# Altium PCB OPAMP_DEV_SOT5_6-23.PcbDoc (part 1 of 2)
Units mm, origin at the board's own origin, x right, y up, seen from the top; angles counter-clockwise.
Board outline 91.45 x 80 mm, 4 copper layers (Top Layer, Layer 1, Layer 2, Bottom Layer), stack 1.586 mm thick; 58 components, 23 nets, 145 pads, 362 vias.
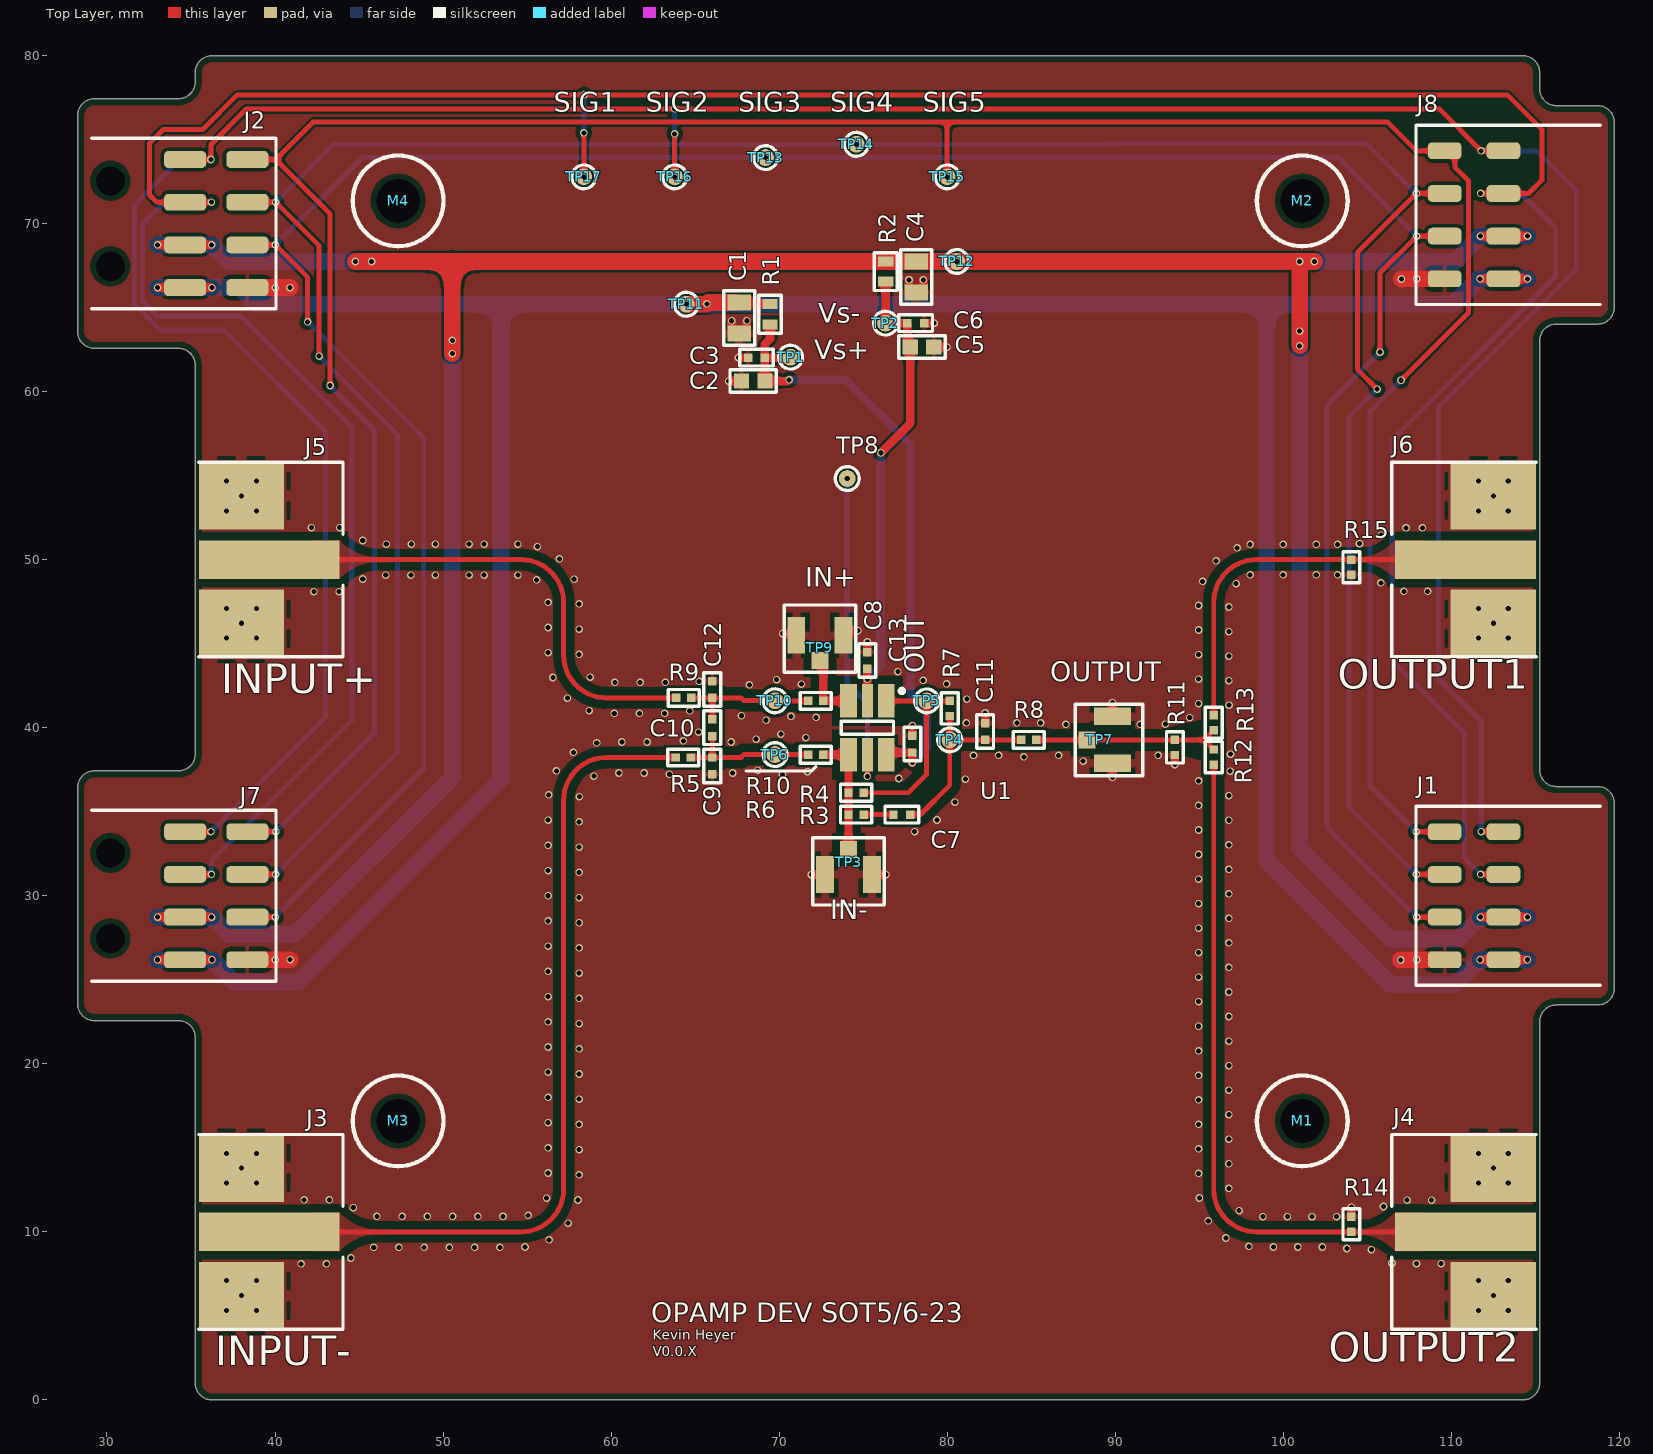
[diagram p0: Top Layer view]
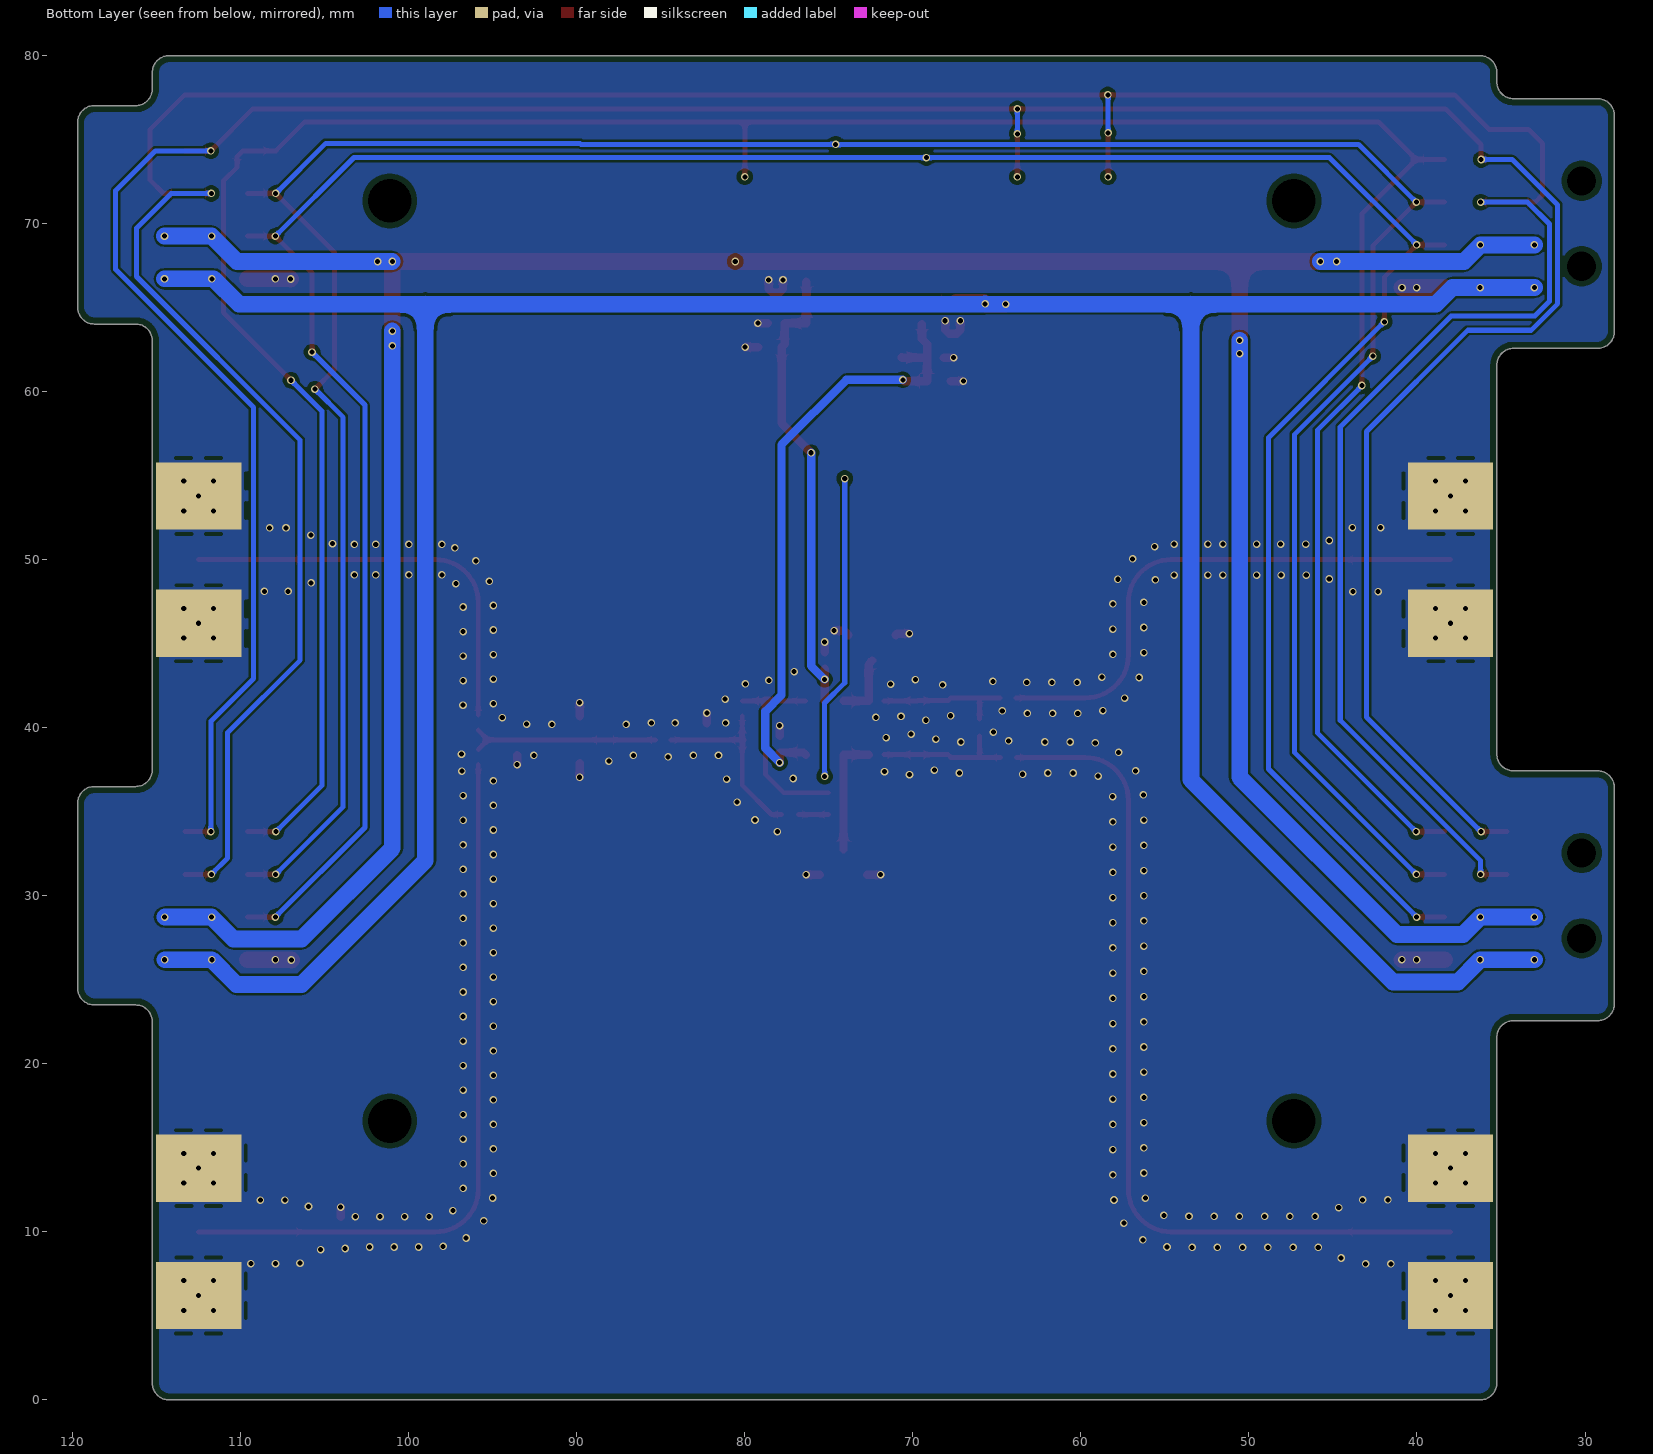
[diagram p1: Bottom Layer view, seen from below]
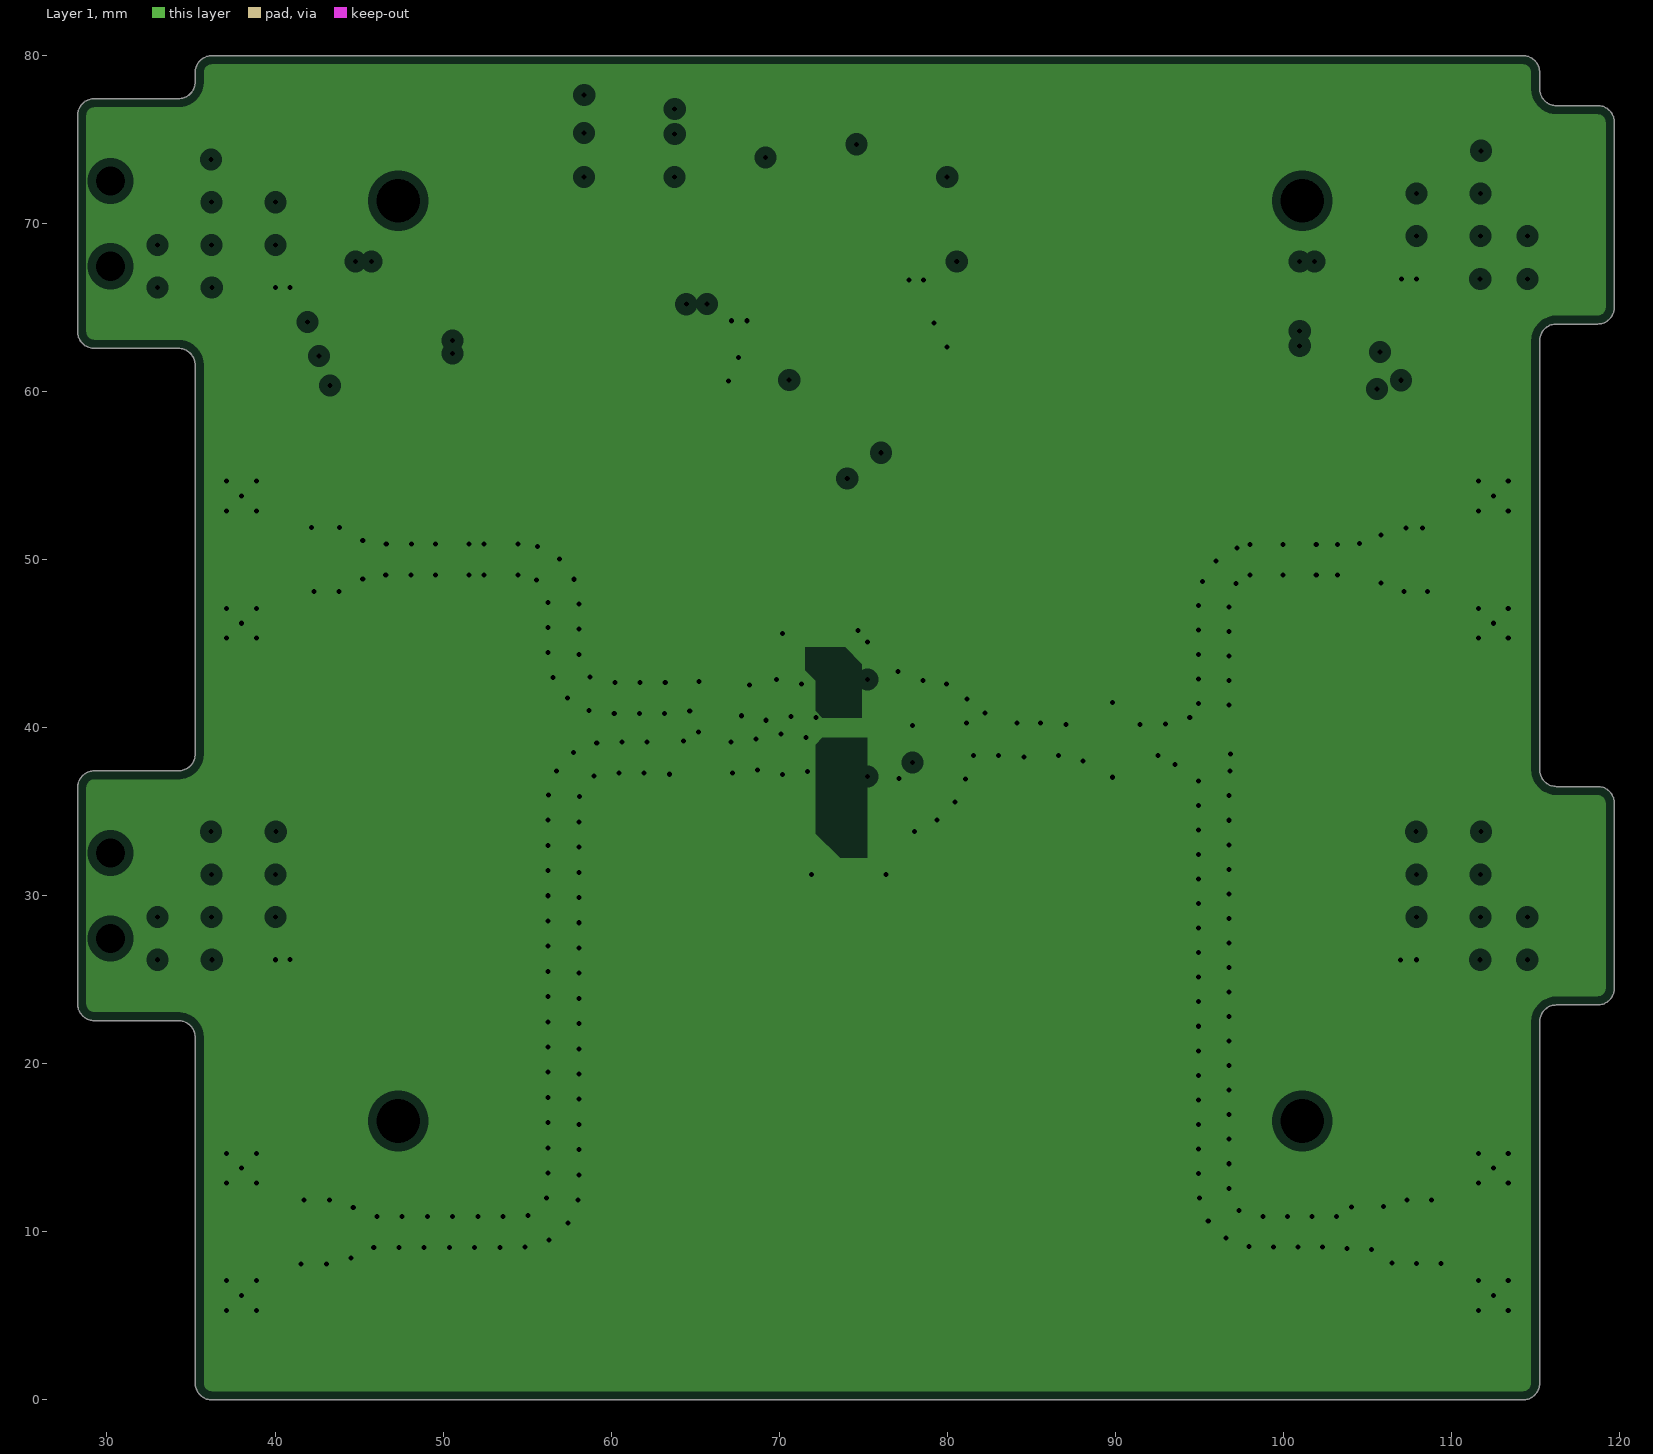
[diagram p2: Layer 1, clearances drawn from the general rule]
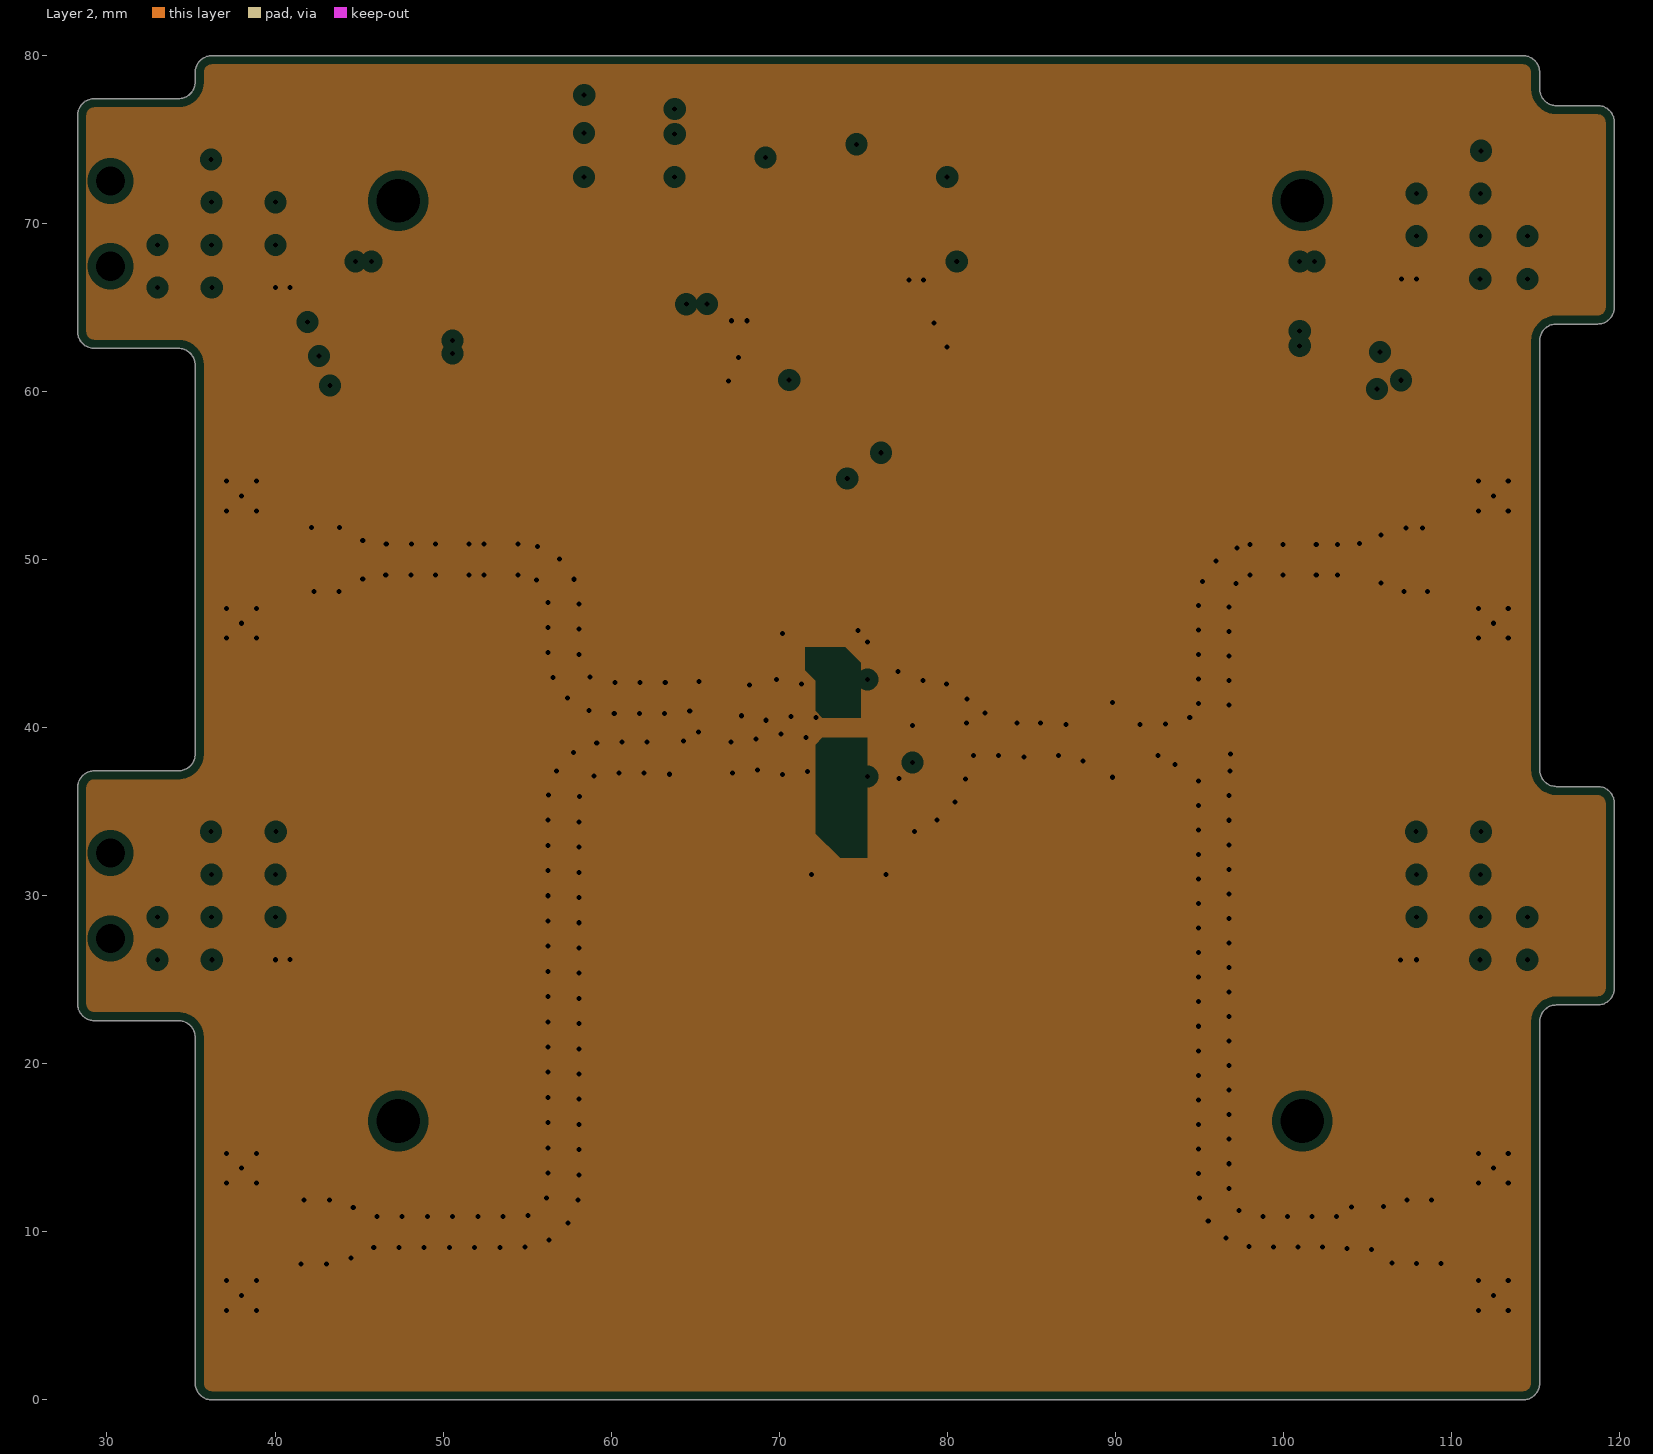
[diagram p3: Layer 2, clearances drawn from the general rule]
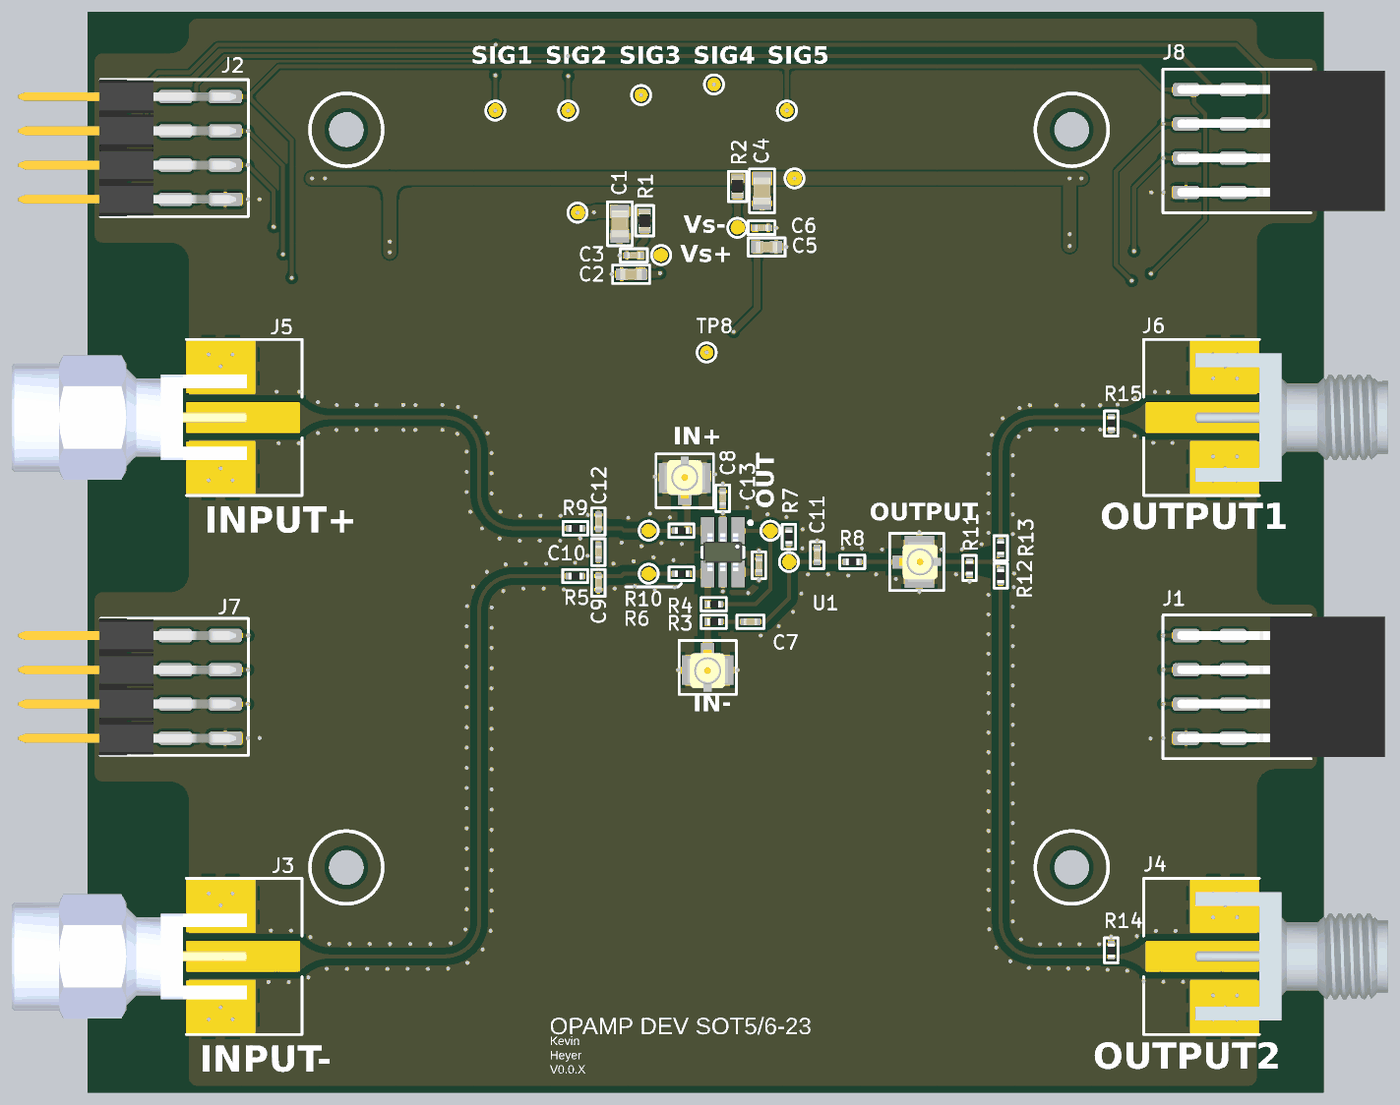
[diagram p4: 3D render of the assembled board from above, using the file's embedded part models]

## Layer stack, top to bottom
Top Solder: solder mask 0.02, SM-001, Dk 3.8
Top Layer: signal copper 0.035
Dielectric 2: prepreg 0.2104, PP-006, Dk 4.6
Layer 1: plane copper 0.0152, net GND
Dielectric 1: dielectric 1.065, FR-4, Dk 4.6
Layer 2: plane copper 0.0152, net GND
Dielectric 3: prepreg 0.2104, PP-006, Dk 4.6
Bottom Layer: signal copper 0.035
Bottom Solder: solder mask 0.02, SM-001, Dk 3.8

## Board outline
29.25,22.57 cw(c29.25,23.57) 28.25,23.57 28.25,36.43 cw(c29.25,36.43) 29.25,37.43 34.25,37.43 ccw(c34.25,38.43) 35.25,38.43 35.25,61.57 ccw(c34.25,61.57) 34.25,62.57 29.25,62.57 cw(c29.25,63.57) 28.25,63.57 28.25,76.43 cw(c29.25,76.43) 29.25,77.43 34.25,77.43 ccw(c34.25,78.43) 35.25,78.43 35.25,78.994 cw(c36.25,78.994) 36.25,79.994 114.25,79.994 cw(c114.25,78.994) 115.25,78.994 115.25,78.02 ccw(c116.25,78.02) 116.25,77.02 118.701,77.02 cw(c118.701,76.02) 119.701,76.02 119.701,65.02 cw(c118.701,65.02) 118.701,64.02 116.25,64.02 ccw(c116.25,63.02) 115.25,63.02 115.25,37.5 ccw(c116.25,37.5) 116.25,36.5 118.701,36.5 cw(c118.701,35.5) 119.701,35.5 119.701,24.5 cw(c118.701,24.5) 118.701,23.5 116.25,23.5 ccw(c116.25,22.5) 115.25,22.5 115.25,0.994 cw(c114.25,0.994) 114.25,-0.006 36.25,-0.006 cw(c36.25,0.994) 35.25,0.994 35.25,21.57 ccw(c34.25,21.57) 34.25,22.57

## Design rules (kind name [scope] priority, off if disabled: settings)
BoardOutlineClearance BoardOutlineClearance_Part [InComponent('J3', 'J4','J5','J6')] p1: gap=0 ignorepadtopadclearanceinfootprint=FALSE
BoardOutlineClearance [OnCopper] p2: gap=0.4 ignorepadtopadclearanceinfootprint=FALSE except(0: Arc-SplitContinuation Track-SplitContinuation SMDPad-SplitContinuation THPad-SplitContinuation Via-SplitContinuation Fill-SplitContinuation Poly-SplitContinuation Region-SplitContinuation Text-SplitContinuation)
Clearance "Schematic Clearance Constraint_1" [InNetClass('HS_NET')] p1: gap=0.254 ignorepadtopadclearanceinfootprint=TRUE except(0: Arc-Hole Track-Hole SMDPad-Hole THPad-Hole Via-Hole Fill-Hole Poly-Hole Region-Hole Text-Hole; 0.5: Via-Via; 0.508: Arc-Fill Arc-Poly Arc-Region Track-Fill Track-Poly Track-Region SMDPad-Fill SMDPad-Poly SMDPad-Region THPad-Fill THPad-Poly THPad-Region Via-Fill Via-Poly Via-Region Fill-Fill Fill-Poly Fill-Region Poly-Poly Poly-Region Region-Region)
Clearance Clearance_HS_PLANE [InNetClass('USB') vs IsCopperRegion and not InNet('4V0')] p2: gap=0.254 ignorepadtopadclearanceinfootprint=FALSE except(0: Arc-Hole Track-Hole SMDPad-Hole THPad-Hole Via-Hole Fill-Hole Poly-Hole Region-Hole Text-Hole; 0.09: Arc-Arc Arc-Track Track-Track; 0.102: Arc-SMDPad Track-SMDPad; 0.127: SMDPad-SMDPad; 0.2: SMDPad-Fill SMDPad-Poly SMDPad-Region Fill-Fill Fill-Poly Fill-Region Poly-Poly Poly-Region Region-Region; 0.33: Arc-THPad Track-THPad SMDPad-THPad; 0.5: Arc-Fill Arc-Poly Arc-Region Track-Fill Track-Poly Track-Region THPad-THPad THPad-Via THPad-Fill THPad-Poly THPad-Region THPad-Text Via-Via)
Clearance Clearance_BGA [InNetClass('BGA_FINE_PITCH') vs not IsThruPin] p3: gap=0.254 ignorepadtopadclearanceinfootprint=FALSE except(0: Arc-Hole Track-Hole SMDPad-Hole THPad-Hole Via-Hole Fill-Hole Poly-Hole Region-Hole Text-Hole; 0.09: Arc-Arc Arc-Track Track-Track; 0.102: Arc-SMDPad Track-SMDPad; 0.127: Arc-Fill Arc-Poly Arc-Region Track-Fill Track-Poly Track-Region SMDPad-SMDPad; 0.2: SMDPad-Fill SMDPad-Poly SMDPad-Region Fill-Fill Fill-Poly Fill-Region Poly-Poly Poly-Region Region-Region; 0.33: Arc-THPad Track-THPad SMDPad-THPad; 0.5: THPad-THPad THPad-Via THPad-Fill THPad-Poly THPad-Region THPad-Text Via-Via)
Clearance Clearance_TH [IsThruPin and InAnyNet] p4: gap=0.3 ignorepadtopadclearanceinfootprint=FALSE except(0: Arc-Hole Track-Hole SMDPad-Hole THPad-Hole Via-Hole Fill-Hole Poly-Hole Region-Hole Text-Hole; 0.09: Arc-Arc Arc-Track Track-Track; 0.127: Arc-SMDPad Track-SMDPad SMDPad-SMDPad; 0.254: Arc-Via Arc-Text Track-Via Track-Text SMDPad-Via SMDPad-Text Via-Text Fill-Text Poly-Text Region-Text Text-Text; 0.33: Arc-THPad Track-THPad SMDPad-THPad; 0.5: THPad-THPad THPad-Via THPad-Text Via-Via)
Clearance [All] p5: gap=0.254 ignorepadtopadclearanceinfootprint=FALSE except(0: Arc-Hole Track-Hole SMDPad-Hole THPad-Hole Via-Hole Fill-Hole Poly-Hole Region-Hole Text-Hole; 0.127: Arc-SMDPad Arc-Fill Arc-Poly Arc-Region Track-SMDPad Track-Fill Track-Poly Track-Region SMDPad-SMDPad; 0.15: Arc-Arc Arc-Track Track-Track; 0.2: SMDPad-Fill SMDPad-Poly SMDPad-Region Fill-Fill Fill-Poly Fill-Region Poly-Poly Poly-Region Region-Region; 0.3: THPad-THPad; 0.31: THPad-Via; 0.32: THPad-Fill THPad-Poly THPad-Region; 0.33: THPad-Text; 0.5: Via-Via)
DiffPairsRouting [All] p1: maxlimit=0.127 minlimit=0.127 mostfreqgap=0.127 toplayer_minwidth=0.102 toplayer_maxwidth=0.147 toplayer_prefwidth=0.147 bottomlayer_minwidth=0.102 bottomlayer_maxwidth=0.147 bottomlayer_prefwidth=0.147 maxuncoupledlength=12.7
HoleSize [All] p1: absolutevalues=TRUE maxlimit=6.3 minlimit=0.3 maxpercent=80.000 minpercent=20.000
HoleToHoleClearance [All] p1: gap=0.1 allowstackedmicrovias=TRUE
MatchedLengths MatchLengths_xSignals_J2_U5 [InxSignalClass('xSignals_J2_U5_MatchLengthsClass')] p1: tolerance=1.1 checknetsindiffpair=FALSE checkdiffpairvsdiffpair=TRUE checkxsignals=TRUE checkothers=TRUE
MatchedLengths MatchLengths_xSignals_U5_J2 [InxSignalClass('xSignals_U5_J2_MatchLengthsClass')] p2: tolerance=2.54 checknetsindiffpair=FALSE checkdiffpairvsdiffpair=TRUE checkxsignals=TRUE checkothers=TRUE
MaxMinImpedance "Schematic Impedance Constraint_1" [InNetClass('HS_NET')] p1: minimum=42.50 maximum=57.50
MinimumAnnularRing [All] p1: minimumring=0.05
PlaneClearance [All] p1: clearance=0.508
PlaneConnect [All] p1: planeconnectstyle=Direct reliefexpansion=0.508 reliefentries=4 reliefconductorwidth=0.254 reliefairgap=0.254
PolygonConnect [All] p1: thpad.connectstyle=Relief thpad.reliefconductorwidth=0.5 thpad.reliefentries=4 thpad.polygonreliefangle="90 Angle" thpad.airgapwidth=0.254 smdpad.connectstyle=Relief smdpad.reliefconductorwidth=0.254 smdpad.reliefentries=4 smdpad.polygonreliefangle="90 Angle" smdpad.airgapwidth=0.254 via.connectstyle=Direct via.reliefconductorwidth=0.254 via.reliefentries=4 via.polygonreliefangle="90 Angle" via.airgapwidth=0.254
RoutingVias [All] p1: holewidth=0.2 width=0.5 viastyle="Through Hole" minholewidth=0.2 minwidth=0.45 maxholewidth=0.4 maxwidth=0.8
SilkToSilkClearance [All] p1: silktosilkclearance=0
SilkToSolderMaskClearance [IsPad] p1: minsilkscreentomaskgap=0 clearancetoexposedcopper=TRUE
SolderMaskExpansion SolderMaskExpansion_VIa [isVia] p1: expansion=0.102 istentingtop=TRUE
SolderMaskExpansion [All] p2: expansion=0.05 istentingtop=FALSE
Width [All] p1: maxlimit=50 minlimit=0.102 preferedwidth=0.254
23 further rules are at their usual default settings.

## Classes and differential pairs
net class HS_NET: INPUT+ INPUT- NetC7_1 NetC7_2 NetC9_1 NetC10_1 NetJ4_1 NetJ6_1 OPAMP+ OPAMP- OPAMP_OUT OUTPUT

## Components (designator, comment, footprint, x,y, rotation, side; value= is the part's Value field where it differs from the comment)
C1 "10uF" c0805 67.616,64.375 r90 top
C2 "1uF" c0603 68.45,60.625 r0 top
C3 "100nF" C0402 68.65,62.025 r0 top
C4 "10uF" c0805 78.154,66.817 r90 top
C5 "1uF" c0603 78.5,62.65 r180 top
C6 "100nF" C0402 78.125,64.075 r180 top
C7 "GENERIC" C0402 77.3,34.83 r180 top
C8 "100nF" C0402 75.25,44 r90 top
C9 "GENERIC" C0402 66.021,37.725 r270 top
C10 "GENERIC" C0402 66.021,40 r270 top
C11 "GENERIC" C0402 82.25,39.775 r270 top
C12 "GENERIC" C0402 66.021,42.275 r270 top
C13 "100nF" C0402 77.925,39.025 r90 top
J1 "M22-6550442R" "CONN HDR 08 FEMALE RA 2ROW" 111.451,30 r270 top locked
J2 "610108249121" "CONN HDR 08 MALE RA 2ROW - duplicate" 36.5,70 r90 top locked
J3 "HJ-SMA362" "SMA SMD PIN BRD EDGE" 38,10 r90 top locked
J4 "HJ-SMA023" "SMA SMD BORE BRD EDGE" 112.5,10 r270 top locked
J5 "HJ-SMA362" "SMA SMD PIN BRD EDGE" 38,50 r90 top locked
J6 "HJ-SMA023" "SMA SMD BORE BRD EDGE" 112.5,50 r270 top locked
J7 "610108249121" "CONN HDR 08 MALE RA 2ROW - duplicate" 36.5,30 r90 top locked
J8 "M22-6550442R" "CONN HDR 08 FEMALE RA 2ROW" 111.451,70.52 r270 top locked
M1 "M2.0" "MECH M2.0 UNPLATED" 101.125,16.6 r0 top
M2 "M2.0" "MECH M2.0 UNPLATED" 101.125,71.35 r0 top
M3 "M2.0" "MECH M2.0 UNPLATED" 47.325,16.6 r0 top
M4 "M2.0" "MECH M2.0 UNPLATED" 47.325,71.35 r0 top
R1 "GENERIC" R0603 69.456,64.6 r90 top
R2 "GENERIC" R0603 76.341,67.142 r90 top
R3 "GENERIC" R0402 74.6,34.83 r180 top
R4 "GENERIC" R0402 74.6,36.129 r180 top
R5 "GENERIC" R0402 64.321,38.225 r180 top
R6 "GENERIC" R0402 72.2,38.394 r180 top
R7 "GENERIC" R0402 80.15,41.119 r90 top
R8 "GENERIC" R0402 84.875,39.275 r180 top
R9 "GENERIC" R0402 64.346,41.775 r180 top
R10 "GENERIC" R0402 72.2,41.594 r180 top
R11 "GENERIC" R0402 93.55,38.85 r270 top
R12 "GENERIC" R0402 95.858,38.225 r90 top
R13 "GENERIC" R0402 95.858,40.325 r270 top
R14 "GENERIC" R0402 104.05,10.425 r90 top
R15 "GENERIC" R0402 104.05,49.575 r270 top
TP1 "1mm" TESTPOINT_SMT 70.675,62.05 r0 top
TP2 "1mm" TESTPOINT_SMT 76.325,64.075 r90 top
TP3 "U.FL" U.FL 74.125,31.25 r180 top
TP4 "1mm" TESTPOINT_SMT 80.15,39.275 r90 top
TP5 "1mm" TESTPOINT_SMT 78.775,41.594 r90 top
TP6 "1mm" TESTPOINT_SMT 69.75,38.4 r90 top
TP7 "U.FL" U.FL 89.825,39.275 r270 top
TP8 "1mm" TESTPOINT_SMT 74.05,54.826 r90 top
TP9 "U.FL" U.FL 72.425,45.5 r0 top
TP10 "1mm" TESTPOINT_SMT 69.75,41.6 r90 top
TP11 "1mm" TESTPOINT_SMT 64.471,65.2 r90 top
TP12 "1mm" TESTPOINT_SMT 80.565,67.742 r90 top
TP13 "1mm" TESTPOINT_SMT 69.187,73.925 r90 top
TP14 "1mm" TESTPOINT_SMT 74.594,74.715 r90 top
TP15 "1mm" TESTPOINT_SMT 80,72.775 r90 top
TP16 "1mm" TESTPOINT_SMT 63.781,72.775 r90 top
TP17 "1mm" TESTPOINT_SMT 58.375,72.775 r90 top
U1 "SOT5/6-23 GENERIC" SOT23-5/6_Modified 75.25,39.994 r270 top

## Footprints (in the part's own frame and the unit in brackets; to place one, negate y for a bottom-side part, rotate by r counter-clockwise, add the part's x,y. Pads: shape width x height; smd on the part's side, far side on the other; paste and mask are expansions set on the pad)
C0402 [mm]
  rect 0.5x0.5 smd: 1(-0.5,0) 2(0.5,0)
  silkscreen extent -1,-0.5 1,0.5, body extent -0.5,-0.25 0.5,0.25, height 0.51
c0603 [mm]
  rect 0.9x0.9 smd: 1(-0.7,0) 2(0.7,0)
  silkscreen extent -1.38,-0.67 1.38,0.67, body extent -0.8,-0.4 0.8,0.4, height 0.81
c0805 [mm]
  rect 0.95x1.4 smd: 1(-0.925,0) 2(0.925,0)
  silkscreen extent -1.63,-0.92 1.63,0.92, body extent -1,-0.62 1,0.63, height 0.61
"CONN HDR 08 FEMALE RA 2ROW" [mm]
  rrect50% 1x2 smd: 1(3.81,1.649) 2(1.27,1.649) 3(-1.27,1.649) 4(-3.81,1.649) 5(3.81,-1.849) 6(1.27,-1.849) 7(-1.27,-1.849) 8(-3.81,-1.849)
  silkscreen extent -5.33,-3.56 5.33,7.41, body extent -5.21,-2.51 5.21,12.89, height 5.01
"CONN HDR 08 MALE RA 2ROW - duplicate" [mm]
  round 0 hole 1.73 unplated: 0(-2.54,6.299) 0(2.54,6.299)
  rrect50% 1x2.5 smd: 1(-3.81,1.849) 2(-1.27,1.849) 3(1.27,1.849) 4(3.81,1.849) 5(-3.81,-1.849) 6(-1.27,-1.849) 7(1.27,-1.849) 8(3.81,-1.849)
  silkscreen extent -5.08,-3.56 5.08,7.41, body extent -5.08,-2.67 5.08,13.49, height 5.09
"MECH M2.0 UNPLATED" [mm]
  round 0 hole 2.6 unplated: 1(0,0)
  silkscreen extent -2.7,-2.7 2.7,2.7
R0402 [mm]
  rect 0.5x0.5 smd: 1(-0.425,0) 2(0.475,0)
  silkscreen extent -0.9,-0.5 0.95,0.5, body extent -0.5,-0.25 0.5,0.25, height 0.36
R0603 [mm]
  rect 0.6x0.9 smd: 1(-0.6,0) 2(0.6,0)
  silkscreen extent -1.12,-0.67 1.12,0.67, body extent -0.77,-0.43 0.78,0.43, height 0.46
"SMA SMD BORE BRD EDGE" [mm]
  rect 4x5.08 smd paste-25.375: 0(-3.786,0) 0(3.786,0)
  rect 4x5.08 smd far side paste-25.375: 0(-3.786,0) 0(3.786,0)
  rect 2.286x8.382 smd paste-25.375: 1(0,-1.651)
  silkscreen extent -5.79,-6.04 5.79,2.54, body extent -4.76,-2.21 4.76,12.07, height 4.36
"SMA SMD PIN BRD EDGE" [mm]
  rect 4x5.08 smd paste-25.375: 0(-3.786,0) 0(3.786,0)
  rect 4x5.08 smd far side paste-25.375: 0(-3.786,0) 0(3.786,0)
  rect 2.286x8.382 smd paste-25.375: 1(0,-1.651)
  silkscreen extent -5.79,-6.04 5.79,2.54, body extent -4.62,-1.96 4.62,15.49, height 4.38
SOT23-5/6_Modified [mm] "SOT23, 6-Leads, Body 2.90x2.80mm, Pitch 0.95mm, IPC Low Density"
  rect 2x1 smd: 1(-1.6,1.125) 3(-1.6,-1.125) 4(1.6,-1.125) 6(1.6,1.125)
  rect 2x0.65 smd: 2(-1.6,0) 5(1.6,0)
  silkscreen extent -2.32,-1.55 0.39,2.18, body extent -1.4,-1.45 1.4,1.45, height 1.45
TESTPOINT_SMT [mm] "testpoint smt"
  round 1 smd paste-1111: 1(0,0)
  silkscreen extent -0.71,-0.71 0.71,0.71
U.FL [mm] "SOT23, 6-Leads, Body 2.90x2.80mm, Pitch 0.95mm, IPC Low Density"
  rect 1.05x2.2 smd: 0(-1.4,0) 0(1.4,0)
  rect 1x1 smd: 1(0,-1.5)
  silkscreen extent -2.12,-2.2 2.12,1.8, body extent -1.5,-1.5 1.5,1.6, height 1.26

## Part data
C1 C4: library part "CAP CER 10uF 25V X5R 0805", "Cap Ceramic 10uF 25V X5R 10% SMD 0805 85°C Embossed T/R", Case Code (Imperial)=0805, Case Code (Metric)=2012, Dielectric=X5R, Manufacturer=Samsung, Manufacturer Part Number=CL21A106KAYNNNE, Max Operating Temperature=85°C, Min Operating Temperature=-55°C, Package Quantity=1, Supplier Part Number 1=1276-2891-2-ND, Tolerance=10%, Voltage Rating=25V, Capacitance=10uF, Case/Package=0805, Category="Ceramic Capacitors", ComponentLink1Description=https://datasheet.ciiva.com/25796/cl21a106kaynnne-25796720.pdf?src-supplier=Digi-Key, ComponentLink1URL=https://datasheet.ciiva.com/25796/cl21a106kaynnne-25796720.pdf?src-supplier=Digi-Key, ComponentLink2Description=https://datasheet.ciiva.com/26838/getdatasheetpartid-357558-26838583.pdf?src-supplier=Verical, ComponentLink2URL=https://datasheet.ciiva.com/26838/getdatasheetpartid-357558-26838583.pdf?src-supplier=Verical, Construction=Flat, Depth=1.25mm, Height=1.25mm, Length=2mm, Mount="Surface Mount", Packaging="Tape and Reel", Pricing 1="2000=0.03549, 4000=0.03247 (USD)", Radiation Hardening=No, RoHS=Yes, RoHS Compliant=Yes, Series=CL, Stock 1=2266338, Supplier 1=Digi-Key, Thickness=0.057inch, Width=0.049inch
C2 C5: library part "CAP CER 1uF 50V X5R 0603", "Multilayer Ceramic Capacitors (High dielectric type), 50V, 1 uF, ± 10 %, 0603, X5R, RoHS", Case Code (Imperial)=0603, Case Code (Metric)=1608, Dielectric=X5R, Manufacturer="Taiyo Yuden", Manufacturer Part Number=UMK107BJ105KA-T, Max Operating Temperature=85°C, Min Operating Temperature=-55°C, Package Quantity=1, Supplier Part Number 1=587-2400-1-ND, Tolerance=10%, Voltage Rating=50V, Capacitance=1uF, Case/Package=0603, Category="Ceramic Capacitors", ComponentLink1Description=https://datasheet.ciiva.com/134/umk107bj105ka-t-ss-134740.pdf?src-supplier=Digi-Key, ComponentLink1URL=https://datasheet.ciiva.com/134/umk107bj105ka-t-ss-134740.pdf?src-supplier=Digi-Key, ComponentLink2Description=https://datasheet.ciiva.com/11601/umk107bj105ka-t-ss-11601811.pdf?src-supplier=Avnet, ComponentLink2URL=https://datasheet.ciiva.com/11601/umk107bj105ka-t-ss-11601811.pdf?src-supplier=Avnet, ComponentLink3Description=https://datasheet.ciiva.com/5744/1697715-5744913.pdf?src-supplier=Farnell, ComponentLink3URL=https://datasheet.ciiva.com/5744/1697715-5744913.pdf?src-supplier=Farnell, ComponentLink4Description=https://datasheet.ciiva.com/30199/43umk107bj105ka-t-30199791.pdf?src-supplier=Onlinecomponents.com, ComponentLink4URL=https://datasheet.ciiva.com/30199/43umk107bj105ka-t-30199791.pdf?src-supplier=Onlinecomponents.com, ComponentLink5Description=https://datasheet.ciiva.com/15922/336umk107bj105ka-t-15922611.pdf?src-supplier=Onlinecomponents.com, ComponentLink5URL=https://datasheet.ciiva.com/15922/336umk107bj105ka-t-15922611.pdf?src-supplier=Onlinecomponents.com, ComponentLink6Description=https://datasheet.ciiva.com/5427/mlcc-all-e-541559-5427036.pdf?src-supplier=Mouser, ComponentLink6URL=https://datasheet.ciiva.com/5427/mlcc-all-e-541559-5427036.pdf?src-supplier=Mouser, ComponentLink7Description=https://datasheet.ciiva.com/7975/mlcc-all-e-7975898.pdf?src-supplier=Element14, ComponentLink7URL=https://datasheet.ciiva.com/7975/mlcc-all-e-7975898.pdf?src-supplier=Element14, ComponentLink8Description=https://datasheet.ciiva.com/7975/1697715-7975608.pdf?src-supplier=Element14, ComponentLink8URL=https://datasheet.ciiva.com/7975/1697715-7975608.pdf?src-supplier=Element14, ComponentLink9Description=https://datasheet.ciiva.com/22694/1697715-22694278.pdf?src-supplier=Element14, ComponentLink9URL=https://datasheet.ciiva.com/22694/1697715-22694278.pdf?src-supplier=Element14, Construction=Flat, Contact Plating=Nickel, Depth=0.8mm, Halogen Free="Halogen Free", Height=0.8mm, Length=1.6mm, Mount="Surface Mount", Number of Pins=2, Packaging="Tape and Reel", Pricing 1="1=0.19000, 10=0.12900, 50=0.07760, 100=0.06560, 500=0.04484, 1000=0.03968 (USD)", Radiation Hardening=No, REACH SVHC=Unknown, RoHS=Yes, RoHS Compliant=Yes, Series=M, Stock 1=955108, Supplier 1=Digi-Key, Termination=SMD/SMT, Thickness=0.035inch, Voltage Rating (DC)=50V, Width=0.031inch
C3 C6 C8 C13: library part "CAP CER 100nF 25V X5R 0402", "Cap Ceramic 0.1uF 25V X5R 10% Pad SMD 0402 85¡ãC T/R / Multi Layer Ceramic Capacitor (MLCC)", Case Code (Imperial)=0402, Case Code (Metric)=1005, Dielectric=X5R, Manufacturer=Samsung, Manufacturer Part Number=CL05A104KA5NNNC, Max Operating Temperature=85°C, Min Operating Temperature=-55°C, Package Quantity=1, Supplier Part Number 1=1276-1043-1-ND, Tolerance=10%, Voltage=25V, Capacitance=100nF, Case/Package=0402, Category="Ceramic Capacitors", ComponentLink1Description=https://datasheet.ciiva.com/25802/cl05a104ka5nnnc-25802704.pdf?src-supplier=Digi-Key, ComponentLink1URL=https://datasheet.ciiva.com/25802/cl05a104ka5nnnc-25802704.pdf?src-supplier=Digi-Key, ComponentLink2Description=https://datasheet.ciiva.com/26838/getdatasheetpartid-357412-26838142.pdf?src-supplier=Verical, ComponentLink2URL=https://datasheet.ciiva.com/26838/getdatasheetpartid-357412-26838142.pdf?src-supplier=Verical, ComponentLink3Description=https://datasheet.ciiva.com/16437/cl05a104ka5nnnc-16437369.pdf?src-supplier=Future+Electronics, ComponentLink3URL=https://datasheet.ciiva.com/16437/cl05a104ka5nnnc-16437369.pdf?src-supplier=Future+Electronics, ComponentLink4Description=https://datasheet.ciiva.com/26309/mlcc-catalogdownload2013-eng-26309014.pdf?src-supplier=Distrelec, ComponentLink4URL=https://datasheet.ciiva.com/26309/mlcc-catalogdownload2013-eng-26309014.pdf?src-supplier=Distrelec, Construction=Flat, Depth=0.5mm, Height=0.5mm, Lead Free="Lead Free", Length=1mm, Mount="Surface Mount", Packaging="Tape and Reel", Pricing 1="1=0.10000, 10=0.01100, 50=0.00600, 100=0.00490, 500=0.00346, 1000=0.00272, 2500=0.00248, 5000=0.00228 (USD)", Radiation Hardening=No, RoHS=Yes, Series=CL, Stock 1=8053194, Supplier 1=Digi-Key, Thickness=0.022inch, Voltage Rating=25V, Voltage Rating (DC)=25V, Width=0.02inch
C7 C9 C10 C11 C12: library part "CAP GENERIC 0402"
J1 J8: library part "CONN HDR 08 FEMALE RA 2 ROW", "Conn Socket Strip RCP 8 POS 2mm Solder RA SMD T/R", Current Rating=2A, Flammability Rating="UL94 V-0", Insulation Color=Black, Manufacturer=Harwin, Max Operating Temperature=105°C, Min Operating Temperature=-40°C, Supplier Part Number 1=45AJ6425, Category=Connectors, ComponentLink1Description=https://cdn.harwin.com/pdfs/M22-655R.pdf?src-supplier=Digi-Key, ComponentLink1URL=https://cdn.harwin.com/pdfs/M22-655R.pdf?src-supplier=Digi-Key, Connector Type=Receptacle,Forked, Contact Material=Bronze, Contact Plating=Gold, Contact Shape=Square, Fastening Type=Push,Pull, Insulation Material=Polymer, Manufacturer Part Number=M22-6550442R, Mount="Surface Mount", Number of Positions=8, Number of Rows=2, Packaging="Cut Tape", Pricing 1="1=1.17000, 100=0.91900, 250=0.84000, 500=0.76600, 1000=0.71200 (USD)", RoHS=Yes, RoHS Compliant=Yes, Stock 1=750, Supplier 1=Newark, Termination=Solder
J2 J7: library part "CONN HDR 08 MALE RA 2 ROW", "SMT Angled Pin Header WR-PHD, Pitch 2.54 mm, Dual Row, 8 pins", Color=Black, Current Rating=3A, Flammability Rating="UL94 V-0", Manufacturer="Wurth Electronics", Supplier Part Number 1=72Y1215, Voltage Rating=250V, Category=Connectors, ComponentLink1Description=http://www.farnell.com/cad/1889791.pdf?src-supplier=Element14, ComponentLink1URL=http://www.farnell.com/cad/1889791.pdf?src-supplier=Element14, ComponentLink2Description=https://katalog.we-online.de/em/datasheet/6101xx249121.pdf?src-supplier=Digi-Key, ComponentLink2URL=https://katalog.we-online.de/em/datasheet/6101xx249121.pdf?src-supplier=Digi-Key, ComponentLink3Description=https://www.distrelec.bizhttp://katalog.we-online.de/em/datasheet/6101xx249121.pdf?mime=application%2Fpdf&src-supplier=Distrelec, ComponentLink3URL=https://www.distrelec.bizhttp://katalog.we-online.de/em/datasheet/6101xx249121.pdf?mime=application%2Fpdf&src-supplier=Distrelec, Connector Type=Header, Contact Finish - Mating=GOLD, Contact Material="Copper Alloy", Contact Mating Length=0.236inch, Contact Plating=Gold, Contact Shape=Square, Contact Type="Male Pin", Fastening Type=Pull, Gender=Male, Insulation Color=Black, Insulation Material=Nylon, Manufacturer Part Number=610108249121, Mount="Surface Mount", Number of Contacts=8, Number of Pins=8, Number of Positions=8, Number of Rows=2, Packaging="Cut Tape", Pitch=0.1inch, Pricing 1="1=1.53000, 10=1.52000, 25=1.49000, 50=1.46000, 100=1.36000 (USD)", RoHS=Yes, RoHS Compliant=Yes, Row Spacing=0.1inch, Series=WR-PHD, Stock 1=350, Supplier 1=Newark, Termination=Solder
J3 J5: library part "CON SMA PIN SMD BRD EDGE HJ-SMA362"
J4 J6: library part "CON SMA BORE SMD BRD EDGE HJ-SMA023"
M1 M2 M3 M4: library part "MECH M2.0 UNPLATED"
R1 R2: library part "RES GENERIC 0603"
R3 R4 R5 R6 R7 R8 R9 R10 R11 R12 R13 R14 R15: library part "RES GENERIC 0402"
TP1 TP2 TP4 TP5 TP6 TP8 TP10 TP11 TP12 TP13 TP14 TP15 TP16 TP17: library part "TP 1mm", "SMT testpoint"
TP3 TP7 TP9: library part "TP U.FL", "CONN U.FL RCPT STR 50 OHM SMD", Case/Package=SMD/SMT, Dielectric Material=Polymer, Housing Color=Beige, Manufacturer=Hirose, Manufacturer Part Number=U.FL-R-SMT-1(80), Max Frequency=6GHz, Max Operating Temperature=90°C, Min Operating Temperature=-40°C, Package Quantity=10000, Body Material=Bronze, Body Plating=Silver, Category="RF / Coaxial Connectors", Center Contact Plating=Gold, ComponentLink1Description=http://www.mouser.com/ds/2/185/U.FL_catalog-939761.pdf?src-supplier=Mouser, ComponentLink1URL=http://www.mouser.com/ds/2/185/U.FL_catalog-939761.pdf?src-supplier=Mouser, ComponentLink2Description=https://www.hirose.com/product/en/download_file/key_name/U.FL-R-SMT-1%2880%29/category/Specification%20Sheet/doc_file_id/37638/?file_category_id=9&item_id=03310472280&is_series=&src-supplier=Digi-Key, ComponentLink2URL=https://www.hirose.com/product/en/download_file/key_name/U.FL-R-SMT-1%2880%29/category/Specification%20Sheet/doc_file_id/37638/?file_category_id=9&item_id=03310472280&is_series=&src-supplier=Digi-Key, Connector Type="Receptacle,Male Pin", Contact Material=Brass, Fastening Type=SNAP-ON, Impedance=50R, Lead Free="Lead Free", Mating Cycles=30, Mount="Surface Mount", Number of Ports=1, Packaging="Tape and Reel", Pricing 1="10000=0.81500, 20000=0.80000, 30000=0.78500 (USD)", RoHS=Yes, RoHS Compliant=Yes, Series=U.FL, Stock 1=40000, Supplier 1="Future Electronics", Termination=Solder
U1: library part "IC OPAMP SOT5/6-23 GENERIC", Case/Package=SOT, Category="Amplifiers - Op Amps, Buffer, Instrumentation", Mount="Surface Mount", Number of Channels=1, Number of Circuits=1, Number of Pins=6, RoHS=Yes, RoHS Compliant=Yes

## Via types
v1: diameter 0.45, hole 0.3, Top Layer to Bottom Layer, tented both sides, 362 vias

## Nets (pads, with @x,y where several pads share a name; then routed paths per layer and width w, separated by ;. In a path a pad name is that pad's centre, name@x,y a point inside that pad or via, vN(x,y) a via of type N, cw(c..) or ccw(c..) an arc to the next point about the centre after c; other vN are vias at no path point)
GND: C1.1 C2.1 C3.1 C4.1 C5.1 C6.1 C8.2 C9.2 C11.1 C12.1 C13.2 J1.5 J2.5 J3.0 J4.0 J5.0 J6.0 J7.5 J8.5 R11.2 R14.2 R15.2 TP3.0 TP7.0 TP9.0 | length 25.3
  Top Layer w0.5: v1@40.89,26.19 v1(40.899,26.199) ; v1(66.996,60.625) C2.1 ; v1(67.171,64.216) 67.171,63.675 67.396,63.45 67.841,63.45 68.066,63.675 68.066,64.211 v1(68.071,64.216) ; v1(67.571,62.025) C3.1 ; v1(70.2,45.598) 70.927,45.598 TP9.0@71.025,45.5 ; v1(71.913,31.25) TP3.0@72.725,31.25 ; TP9.0@73.825,45.501 74.1,45.776 v1(74.684,45.776) ; C8.2 v1(75.25,45.1) ; TP3.0@75.525,31.25 v1(76.347,31.25) ; v1(77.725,66.65) 77.725,66.117 77.95,65.892 C4.1 78.35,65.892 78.575,66.117 v1(78.575,66.65) ; C13.2 v1(77.925,40.125) ; C6.1 v1(79.225,64.075) ; C5.1 v1(79.975,62.65) ; C11.1 v1(82.25,40.875) ; v1(89.825,37.051) TP7.0@89.825,37.875 ; TP7.0@89.825,40.675 v1(89.825,41.494) ; v1(93.55,37.8) R11.2 ; R14.2 v1(104.05,11.475)
  Top Layer w1: J7.5 v1@40.89,26.19 ; J2.5 v1(40.022,66.19) v1(40.89,66.19) ; v1(106.975,26.175) 106.99,26.19 J1.5 ; v1(107.025,66.7) 107.035,66.71 J8.5
  other v1: 37.116,5.33 38.884,5.33 111.616,5.33 113.384,5.33 38,6.214 112.5,6.214 37.116,7.097 38.884,7.097 111.616,7.097 113.384,7.097 41.556,8.092 43.056,8.092 107.924,8.113 109.384,8.113 106.464,8.138 44.514,8.444 105.243,8.938 103.785,9.008 45.874,9.077 47.374,9.077 48.874,9.077 50.374,9.077 51.874,9.077 53.374,9.077 54.874,9.097 99.407,9.097 100.867,9.097 102.327,9.097 97.948,9.134 56.313,9.521 96.576,9.633 57.435,10.516 95.531,10.652 46.063,10.923 47.563,10.923 49.063,10.923 50.563,10.923 52.063,10.923 53.563,10.923 98.785,10.903 100.245,10.903 101.705,10.903 103.165,10.903 55.062,10.981 97.371,11.266 44.653,11.435 105.96,11.506 107.369,11.887 108.829,11.887 41.73,11.908 43.23,11.908 58.029,11.894 56.161,12.002 95.004,12.014 96.761,12.592 37.116,12.903 38.884,12.903 111.616,12.903 113.384,12.903 58.098,13.392 94.955,13.473 56.252,13.5 38,13.786 112.5,13.786 96.761,14.052 37.116,14.67 38.884,14.67 111.616,14.67 113.384,14.67 58.098,14.892 94.955,14.933 56.252,15 96.761,15.512 58.098,16.392 94.955,16.393 56.252,16.5 96.761,16.972 94.955,17.853 58.098,17.892 56.252,18 96.761,18.432 94.955,19.313 58.098,19.392 56.252,19.5 96.761,19.892 94.955,20.773 58.098,20.892 56.252,21 96.761,21.352 94.955,22.233 58.098,22.392 56.252,22.5 96.761,22.812 94.955,23.693 58.098,23.892 56.252,24 96.761,24.272 94.955,25.153 58.098,25.392 56.252,25.5 96.761,25.732 40.022,26.19 107.929,26.19 94.955,26.613 58.098,26.892 56.252,27 96.761,27.192 94.955,28.073 58.098,28.392 56.252,28.5 96.761,28.652 94.955,29.533 58.098,29.892 56.252,30 96.761,30.112 94.955,30.993 58.098,31.392 56.252,31.5 96.761,31.572 94.955,32.453 58.098,32.892 56.252,33 96.761,33.032 78.058,33.817 94.955,33.913 58.098,34.392 96.761,34.492 56.252,34.5 79.389,34.508 94.955,35.373 80.45,35.569 58.111,35.892 96.761,35.952 56.278,35.999 94.955,36.833 81.073,36.933 77.125,36.975 58.972,37.12 70.195,37.207 63.459,37.228 60.461,37.302 61.961,37.302 67.23,37.302 71.685,37.379 96.834,37.41 56.735,37.428 68.72,37.477 88.087,38.01 84.558,38.26 81.561,38.352 83.061,38.352 86.626,38.352 92.547,38.352 96.855,38.426 57.753,38.53 59.143,39.093 60.642,39.148 62.142,39.148 67.142,39.148 64.294,39.213 68.632,39.323 71.588,39.409 70.103,39.618 65.21,39.735 87.06,40.198 91.481,40.198 92.981,40.214 81.144,40.285 84.143,40.289 85.562,40.288 69.222,40.441 94.432,40.595 72.203,40.618 70.704,40.674 67.747,40.71 60.185,40.852 61.685,40.852 63.185,40.852 58.694,41.012 64.677,41.005 96.765,41.341 94.955,41.431 81.164,41.703 57.393,41.76 68.227,42.552 71.324,42.589 79.969,42.609 60.221,42.698 61.721,42.698 63.221,42.698 65.235,42.757 96.761,42.801 78.565,42.811 69.849,42.863 94.955,42.891 56.53,42.986 58.754,43.013 77.057,43.332 96.761,44.261 58.098,44.362 94.955,44.351 56.252,44.46 37.116,45.33 38.884,45.33 111.616,45.33 113.384,45.33 96.761,45.721 94.955,45.811 58.098,45.862 56.252,45.96 38,46.214 112.5,46.214 37.116,47.097 38.884,47.097 111.616,47.097 113.384,47.097 96.761,47.181 94.955,47.271 58.098,47.362 56.252,47.46 42.309,48.092 43.809,48.092 107.171,48.113 108.591,48.113 97.196,48.575 105.803,48.623 95.202,48.71 55.56,48.791 57.802,48.832 45.219,48.848 46.588,49.077 48.088,49.077 49.546,49.077 51.554,49.077 52.446,49.077 54.454,49.077 98.023,49.097 99.991,49.097 101.959,49.097 103.234,49.097 96.006,49.929 56.921,50.046 97.248,50.697 55.61,50.775 98.023,50.903 99.991,50.903 101.959,50.903 103.234,50.903 46.617,50.923 48.117,50.923 49.546,50.923 51.554,50.923 52.446,50.923 54.454,50.923 104.532,50.953 45.219,51.14 105.824,51.456 107.297,51.887 108.275,51.887 42.162,51.908 43.844,51.907 37.116,52.903 38.884,52.903 111.616,52.903 113.384,52.903 38,53.786 112.5,53.786 37.116,54.67 38.884,54.67 111.616,54.67 113.384,54.67 107.929,66.71
INPUT+: J5.1 R9.2 | length 31.9
  Top Layer w0.293: J5.1@38,50 54.635,50 cw(c54.635,47.46) 57.175,47.46 57.175,44.315 ccw(c59.715,44.315) 59.715,41.775 R9.2
INPUT-: J3.1 R5.2 | length 51.9
  Top Layer w0.293: J3.1@38,10 54.635,10 ccw(c54.635,12.54) 57.175,12.54 57.175,35.685 cw(c59.715,35.685) 59.715,38.225 R5.2
NetC7_1: C7.1 C11.2 R7.1 R8.2 TP4.1 | length 11.4
  Top Layer w0.293: C7.1 78.405,34.83 80.15,36.575 TP4.1 ; R7.1 TP4.1 ; R8.2 C11.2 TP4.1
NetC7_2: C7.2 R3.1 | length 1.8
  Top Layer w0.293: R3.1 C7.2
NetC9_1: C9.1 C10.2 R5.1 R6.2 TP6.1 | length 8.3
  Top Layer w0.293: R5.1@64.771,38.225 C9.1 ; C10.2 C9.1 ; R6.2 TP6.1 67.9,38.4 67.725,38.225 C9.1
NetC10_1: C10.1 C12.2 R9.1 R10.2 TP10.1 | length 8.3
  Top Layer w0.293: R9.1@64.796,41.775 C12.2 ; C10.1 C12.2 ; R10.2 TP10.1 69.737,41.613 67.9,41.613 67.738,41.775 C12.2
NetJ4_1: J4.1 R12.1 R14.1 | length 43.4
  Top Layer w0.293: R12.1 95.858,12.54 ccw(c98.398,12.54) 98.398,10 R14.1 J4.1@112.5,10
NetJ6_1: J6.1 R13.1 R15.1 | length 24.8
  Top Layer w0.293: R13.1 95.858,47.46 cw(c98.398,47.46) 98.398,50 R15.1 J6.1@112.5,50
OPAMP+: R10.1 TP9.1 U1.3 | length 4
  Top Layer w0.5: TP9.1 72.625,43.75 R10.1 73.875,41.594 U1.3
OPAMP-: R3.2 R4.2 R6.1 TP3.1 U1.4 | length 7.1
  Top Layer w0.5: R6.1 73.875,38.394 U1.4 R4.2 TP3.1
OPAMP_OUT: R4.1 R7.2 TP5.1 U1.1 | length 12.4
  Top Layer w0.293: R4.1 77.679,36.129 78.775,37.225 TP5.1@78.775,41.369 ; U1.1 TP5.1@78.55,41.594 ; TP5.1 R7.2
  Top Layer w0.5: TP5.1@78.775,41.369 78.55,41.594 TP5.1
OUTPUT: R8.1 R11.1 R12.2 R13.2 TP7.1 | length 11.6
  Top Layer w0.293: R8.1 TP7.1 R11.1 95.283,39.275 ; R12.2 95.283,39.275 ; R13.2 95.283,39.275
SIG1: J1.3 J2.3 J7.3 J8.3 TP17.1 | length 211.7
  Top Layer w0.3: J7.3 v1(36.212,31.27) ; v1(36.212,71.27) J2.3 32.955,71.27 32.525,71.7 32.525,74.775 33.35,75.6 35.7,75.6 37.755,77.655 v1(58.398,77.655) 113.329,77.655 115.4,75.584 115.4,72.6 114.59,71.79 J8.3 v1(111.739,71.79) ; v1(58.375,72.775) v1(58.375,75.392) ; v1(111.739,31.27) J1.3 J1.3@113.3,31.27
  Bottom Layer w0.3: v1(36.212,31.27) 36.212,32.087 44.565,40.44 44.565,57.897 37.961,64.5 32.991,64.5 32.118,65.373 32.118,69.968 33.42,71.27 v1(36.212,71.27) ; v1(58.375,75.392) 58.375,77.633 v1(58.398,77.655) ; v1(111.739,31.27) 110.775,32.234 110.775,39.7 106.458,44.017 106.458,57.108 116.2,66.85 116.2,69.725 114.135,71.79 v1(111.739,71.79)
SIG2: J1.4 J2.4 J7.4 J8.4 TP16.1 | length 191.7
  Top Layer w0.3: J7.4 v1(36.184,33.81) ; J2.4 v1(36.184,73.81) 36.184,74.709 38.3,76.825 109.271,76.825 v1(111.766,74.33) J8.4 J8.4@113.3,74.33 ; v1(63.781,72.775) v1(63.781,72.775) 63.782,75.334 v1(63.784,75.335) ; v1(111.766,33.81) J1.4 J1.4@113.3,33.81
  Bottom Layer w0.3: v1(36.184,33.81) 43,40.626 43,57.625 36.975,63.65 33.205,63.65 31.625,65.23 31.625,71.1 34.335,73.81 v1(36.184,73.81) ; v1(63.784,75.335) v1(63.784,76.825) ; 110.014,59.839 109.225,59.05 ; v1(111.766,33.81) 111.766,40.384 109.225,42.925 109.225,59.05 ; v1(111.766,74.33) 115.07,74.33 117.45,71.95 117.45,67.275 109.225,59.05
SIG3: J1.6 J2.6 J7.6 J8.6 TP13.1 | length 170.9
  Top Layer w0.3: J7.6 v1(40.02,28.73) ; J2.6 v1(40.02,68.73) 41.939,66.811 v1(41.939,64.147) ; v1(105.75,62.35) 105.75,67.069 v1(107.931,69.25) J8.6 ; v1(107.931,28.73) J1.6
  Bottom Layer w0.3: v1(40.02,28.73) 48.832,37.542 48.832,57.254 v1(41.939,64.147) ; v1(40.02,68.73) 45.215,73.925 v1(69.187,73.925) 103.256,73.925 v1(107.931,69.25) ; v1(105.75,62.35) 102.6,59.2 102.6,34.061 v1(107.931,28.73)
SIG4: J1.7 J2.7 J7.7 J8.7 TP14.1 | length 168.2
  Top Layer w0.3: J7.7 v1(40.035,31.27) ; J2.7 v1(40.035,71.27) 42.625,68.68 v1(42.625,62.109) ; v1(105.577,60.148) 104.4,61.325 104.4,68.274 v1(107.916,71.79) J8.7 ; v1(107.916,31.27) J1.7
  Bottom Layer w0.3: v1(40.035,31.27) 47.3,38.535 47.3,57.434 v1(42.625,62.109) ; v1(40.035,71.27) 43.465,74.7 74.579,74.7 v1(74.594,74.715) 89.753,74.715 89.813,74.775 104.931,74.775 v1(107.916,71.79) ; v1(105.577,60.148) 103.898,58.47 103.898,35.288 v1(107.916,31.27)
SIG5: J1.8 J2.8 J7.8 J8.8 TP15.1 | length 169.3
  Top Layer w0.3: J7.8 v1(40.044,33.81) ; J2.8 40.044,73.81 ; v1(43.275,60.361) 43.275,70.579 40.044,73.81 ; TP15.1 v1(79.997,72.775) 79.997,76.05 ; v1(107,60.675) 111.025,64.7 111.025,72.525 110.202,73.348 110.202,73.988 109.859,74.33 J8.8 107.907,74.33 106.187,76.05 79.997,76.05 ; v1(107.907,33.81) J1.8 ; 40.044,73.81 42.284,76.05 79.997,76.05
  Bottom Layer w0.3: v1(40.044,33.81) 45.925,39.691 45.925,57.7 43.275,60.35 v1(43.275,60.361) ; v1(107,60.675) 105.169,58.844 105.169,36.548 v1(107.907,33.81)
STBY: TP8.1 U1.5 | length 19.5
  Top Layer w0.3: v1(75.25,37.1) U1.5
  Bottom Layer w0.3: v1(74.05,54.826) 74.05,42.669 75.25,41.469 v1(75.25,37.1)
Vs+: C2.2 C3.2 C13.1 R1.1 TP1.1 U1.6 | length 37.2
  Top Layer w0.5: R1.1 69.456,63.131 69.15,62.825 C3.2 ; v1(70.596,60.7) 70.521,60.625 C2.2 C3.2 ; TP1.1 70.65,62.025 C3.2 ; U1.6 76.506,38.525 C13.1 v1(77.925,37.925)
  Bottom Layer w0.5: v1(70.596,60.7) 73.95,60.7 77.811,56.839 77.811,41.933 78.775,40.969 78.775,38.775 v1(77.925,37.925)
Vs-: C5.2 C6.2 C8.1 R2.1 TP2.1 U1.2 | length 28
  Top Layer w0.5: U1.2 v1(75.25,42.875) C8.1 ; v1(76.05,56.361) 77.8,58.111 C5.2 77.625,62.825 C6.2 TP2.1 76.333,64.083 76.333,66.534 R2.1
  Bottom Layer w0.5: v1(75.25,42.875) 76.05,43.675 v1(76.05,56.361)
Vsin+: C1.2 J1.1 J2.1 J7.1 J8.1 R1.2 TP11.1 | length 206
  Top Layer w0.5: v1(33.01,26.19) J7.1 v1(36.235,26.19) ; v1(33.01,66.19) J2.1 v1(36.235,66.19) ; C1.2 67.666,65.25 69.406,65.25 R1.2 ; v1(111.716,26.19) J1.1 v1(114.517,26.19) ; v1(111.716,66.71) J8.1 v1(114.53,66.71)
  Top Layer w1: v1(64.471,65.2) 65.683,65.2 65.78,65.297 C1.2@67.416,65.297
  Bottom Layer w1: v1(33.01,26.19) v1(36.235,26.19) 37.55,24.875 41.425,24.875 53.45,36.9 53.45,65.2 ; v1(33.01,66.19) v1(36.235,66.19) 37.885,66.19 38.875,65.2 53.45,65.2 ; v1(114.517,26.19) v1(111.716,26.19) 110.251,24.725 106.375,24.725 99.007,32.093 99.007,65.2 ; v1(114.53,66.71) v1(111.716,66.71) 111.598,66.71 110.088,65.2 99.007,65.2 ; 53.45,65.2 v1(64.471,65.2) 65.683,65.2 v1(65.7,65.217) 65.716,65.2 99.007,65.2
Vsin-: C4.2 J1.2 J2.2 J7.2 J8.2 R2.2 TP12.1 | length 201.8
  Top Layer w0.5: v1(33.01,28.73) J7.2 v1(36.221,28.73) ; v1(33.01,68.73) J2.2 v1(36.221,68.73) ; v1(111.73,28.73) J1.2 v1(114.517,28.73) ; v1(111.73,69.25) J8.2 v1(114.53,69.25)
  Top Layer w1: v1(44.781,67.742) v1(45.746,67.742) 50.55,67.742 ; v1(50.55,62.256) v1(50.55,63.05) 50.55,67.742 ; v1(100.975,62.726) v1(100.975,63.6) v1(100.975,67.742) ; v1(101.85,67.742) v1(100.975,67.742) ; 50.55,67.742 R2.2 C4.2 v1(80.565,67.742) v1(100.975,67.742)
  Bottom Layer w1: v1(33.01,28.73) v1(36.221,28.73) 37.251,27.7 41.2,27.7 50.55,37.05 v1(50.55,62.256) v1(50.55,63.05) ; v1(33.01,68.73) v1(36.221,68.73) 37.209,67.742 v1(44.781,67.742) v1(45.746,67.742) ; v1(100.975,63.6) v1(100.975,62.726) 100.975,51.311 100.975,32.825 106.375,27.425 110.425,27.425 v1(111.73,28.73) v1(114.517,28.73) ; v1(100.975,67.742) v1(101.85,67.742) 110.222,67.742 v1(111.73,69.25) v1(114.53,69.25)
pads on no net: J2.0 J7.0 M1.1 M2.1 M3.1 M4.1

## Polygon pours and split planes (outlines as drawn)
GND on Top Layer "GND_L01_P063" (solid, remove dead copper, pour order 63): 41 vertices, not listed, extent 28.25,-0.006 119.701,79.994
GND on Top Layer "Top Layer-GND" (solid, pour order 54): 193 vertices, not listed, extent 34.438,7.835 65.118,39.497
GND on Top Layer "Top Layer-GND 6" (solid, pour order 60): 150 vertices, not listed, extent 94.626,39.519 116.021,52.124
GND on Top Layer "Top Layer-GND 7" (solid, pour order 59): 150 vertices, not listed, extent 94.626,7.876 116.021,39.032
GND on Top Layer "Top Layer-GND 2" (solid, pour order 53): 193 vertices, not listed, extent 34.438,40.503 65.143,52.165
GND on Top Layer "Top Layer-GND 1" (solid, pour order 46): 121 vertices, not listed, extent 84.028,37.536 97.13,41.014
GND on Top Layer "Top Layer-GND 3" (solid, pour order 45): 119 vertices, not listed, extent 73.753,34.857 81.422,43.616
GND on Top Layer "Top Layer-GND 4" (solid, pour order 44): 127 vertices, not listed, extent 76.528,33.558 85.672,41.966
GND on Top Layer "Top Layer-GND 5" (solid, pour order 43): 129 vertices, not listed, extent 63.474,36.871 72.997,40.772
GND on Top Layer "Top Layer-GND 8" (solid, pour order 39): 138 vertices, not listed, extent 63.499,39.228 72.997,43.129
NetJ6_1 on Top Layer "NETJ6_1_L01_P000" (solid, pour order 0): 106.658,51.143 108.275,51.143 108.275,48.857 106.658,48.857 ccw(c104.348,46.683) 104.444,49.854 103.679,49.854 103.679,50.143 104.444,50.146 ccw(c104.347,53.317)
NetJ4_1 on Top Layer "NETJ4_1_L01_P006" (solid, pour order 6): 106.658,11.143 108.275,11.143 108.275,8.857 106.658,8.857 ccw(c104.348,6.683) 104.444,9.854 103.679,9.854 103.679,10.143 104.444,10.146 ccw(c104.347,13.317)
INPUT- on Top Layer "INPUT-_L01_P033" (solid, pour order 33): 43.842,8.857 42.225,8.857 42.225,11.143 43.842,11.143 ccw(c46.152,13.317) 46.056,10.146 46.821,10.146 46.821,9.857 46.056,9.854 ccw(c46.153,6.683)
INPUT+ on Top Layer "INPUT+_L01_P036" (solid, pour order 36): 43.842,48.857 42.225,48.857 42.225,51.143 43.842,51.143 ccw(c46.152,53.317) 46.056,50.146 46.821,50.146 46.821,49.857 46.056,49.854 ccw(c46.153,46.683)
GND on Bottom Layer "GND_L04_P038" (solid, remove dead copper, pour order 38): 41 vertices, not listed, extent 28.25,-0.006 119.701,79.994
GND on Layer 2 (split plane): 269 vertices, not listed, extent 28.759,0.503 119.191,79.485
GND on Layer 1 (split plane): 269 vertices, not listed, extent 28.759,0.503 119.191,79.485

## Other copper
Top Layer:
  pour cut-out: 113.842,56.147 cw(c113.842,56.047) 113.842,55.946 112.942,55.946 cw(c112.942,56.047) 112.942,56.147
  pour cut-out: 112.074,56.147 cw(c112.074,56.047) 112.074,55.946 111.174,55.946 cw(c111.174,56.047) 111.174,56.147
  pour cut-out: 109.594,53.376 cw(c109.695,53.376) 109.795,53.376 109.795,52.476 cw(c109.695,52.476) 109.594,52.476
  pour cut-out: 109.594,55.144 cw(c109.695,55.144) 109.795,55.144 109.795,54.244 cw(c109.695,54.244) 109.594,54.244
  pour cut-out: 109.594,46.624 ccw(c109.695,46.624) 109.795,46.624 109.795,47.524 ccw(c109.695,47.524) 109.594,47.524
  pour cut-out: 109.594,44.856 ccw(c109.695,44.856) 109.795,44.856 109.795,45.756 ccw(c109.695,45.756) 109.594,45.756
  pour cut-out: 113.842,43.853 ccw(c113.842,43.953) 113.842,44.054 112.942,44.054 ccw(c112.942,43.953) 112.942,43.853
  pour cut-out: 112.074,43.853 ccw(c112.074,43.953) 112.074,44.054 111.174,44.054 ccw(c111.174,43.953) 111.174,43.853
  pour cut-out: 40.906,46.624 cw(c40.805,46.624) 40.705,46.624 40.705,47.524 cw(c40.805,47.524) 40.906,47.524
  pour cut-out: 40.906,44.856 cw(c40.805,44.856) 40.705,44.856 40.705,45.756 cw(c40.805,45.756) 40.906,45.756
  pour cut-out: 38.426,43.853 cw(c38.426,43.953) 38.426,44.054 39.326,44.054 cw(c39.326,43.953) 39.326,43.853
  pour cut-out: 36.658,43.853 cw(c36.658,43.953) 36.658,44.054 37.558,44.054 cw(c37.558,43.953) 37.558,43.853
  pour cut-out: 36.658,56.147 ccw(c36.658,56.047) 36.658,55.946 37.558,55.946 ccw(c37.558,56.047) 37.558,56.147
  pour cut-out: 38.426,56.147 ccw(c38.426,56.047) 38.426,55.946 39.326,55.946 ccw(c39.326,56.047) 39.326,56.147
  pour cut-out: 40.906,55.144 ccw(c40.805,55.144) 40.705,55.144 40.705,54.244 ccw(c40.805,54.244) 40.906,54.244
  pour cut-out: 40.906,53.376 ccw(c40.805,53.376) 40.705,53.376 40.705,52.476 ccw(c40.805,52.476) 40.906,52.476
  pour cut-out: 40.906,6.624 cw(c40.805,6.624) 40.705,6.624 40.705,7.524 cw(c40.805,7.524) 40.906,7.524
  pour cut-out: 40.906,4.856 cw(c40.805,4.856) 40.705,4.856 40.705,5.756 cw(c40.805,5.756) 40.906,5.756
  pour cut-out: 38.426,3.853 cw(c38.426,3.953) 38.426,4.054 39.326,4.054 cw(c39.326,3.953) 39.326,3.853
  pour cut-out: 36.658,3.853 cw(c36.658,3.953) 36.658,4.054 37.558,4.054 cw(c37.558,3.953) 37.558,3.853
  pour cut-out: 36.658,16.147 ccw(c36.658,16.047) 36.658,15.946 37.558,15.946 ccw(c37.558,16.047) 37.558,16.147
  pour cut-out: 38.426,16.147 ccw(c38.426,16.047) 38.426,15.946 39.326,15.946 ccw(c39.326,16.047) 39.326,16.147
  pour cut-out: 40.906,15.144 ccw(c40.805,15.144) 40.705,15.144 40.705,14.244 ccw(c40.805,14.244) 40.906,14.244
  pour cut-out: 40.906,13.376 ccw(c40.805,13.376) 40.705,13.376 40.705,12.476 ccw(c40.805,12.476) 40.906,12.476
  pour cut-out: 109.594,6.624 ccw(c109.695,6.624) 109.795,6.624 109.795,7.524 ccw(c109.695,7.524) 109.594,7.524
  pour cut-out: 109.594,4.856 ccw(c109.695,4.856) 109.795,4.856 109.795,5.756 ccw(c109.695,5.756) 109.594,5.756
  pour cut-out: 112.074,3.853 ccw(c112.074,3.953) 112.074,4.054 111.174,4.054 ccw(c111.174,3.953) 111.174,3.853
  pour cut-out: 113.842,3.853 ccw(c113.842,3.953) 113.842,4.054 112.942,4.054 ccw(c112.942,3.953) 112.942,3.853
  pour cut-out: 113.842,16.147 cw(c113.842,16.047) 113.842,15.946 112.942,15.946 cw(c112.942,16.047) 112.942,16.147
  pour cut-out: 112.074,16.147 cw(c112.074,16.047) 112.074,15.946 111.174,15.946 cw(c111.174,16.047) 111.174,16.147
  pour cut-out: 109.594,15.144 cw(c109.695,15.144) 109.795,15.144 109.795,14.244 cw(c109.695,14.244) 109.594,14.244
  pour cut-out: 109.594,13.376 cw(c109.695,13.376) 109.795,13.376 109.795,12.476 cw(c109.695,12.476) 109.594,12.476
  pour cut-out: 77.57,40.272 77.388,40.454 77.388,40.922 78.014,40.922 78.103,40.833
  pour cut-out: 95.608,40.5 96.108,40.5 96.201,40.482 96.304,40.461 96.381,40.409 96.47,40.35 96.53,40.261 96.582,40.183 96.602,40.08 96.621,39.987 96.621,39.133 96.621,38.558 96.602,38.465 96.581,38.362 96.53,38.285 96.47,38.196 96.381,38.136 96.304,38.084 96.201,38.064 96.108,38.045 95.185,38.045 95.138,38.055 95.137,38.055 95.117,38.059 95.052,38.063 95.029,38.069 95.013,38.07 94.184,38.276 94.149,38.293 94.112,38.3 94.06,38.335 94.003,38.362 93.977,38.39 93.945,38.411 93.911,38.463 93.869,38.51 93.863,38.525 93.8,38.512 93.3,38.512 93.104,38.551 93.026,38.603 89.304,38.603 89.299,38.579 89.188,38.412 89.021,38.301 88.825,38.262 87.825,38.262 87.629,38.301 87.462,38.412 87.351,38.579 87.346,38.603 85.824,38.603 85.746,38.551 85.55,38.512 85.05,38.512 84.854,38.551 84.687,38.662 84.576,38.829 84.537,39.025 84.537,39.525 84.576,39.721 84.687,39.888 84.854,39.999 85.05,40.038 85.55,40.038 85.746,39.999 85.824,39.947 87.346,39.947 87.351,39.971 87.462,40.138 87.629,40.249 87.825,40.288 88.825,40.288 89.021,40.249 89.188,40.138 89.299,39.971 89.304,39.947 93.015,39.947 93.052,39.964 93.104,39.999 93.141,40.006 93.176,40.023 95.031,40.485 95.05,40.49 95.113,40.493 95.174,40.505 95.584,40.505
  pour cut-out: 77.071,43.068 77.238,42.957 77.349,42.79 77.388,42.594 77.388,42.266 78.014,42.266 78.059,42.31 78.13,42.381 78.295,42.491 78.48,42.568 78.675,42.607 78.875,42.607 79.07,42.568 79.255,42.491 79.42,42.381 79.491,42.31 79.536,42.266 79.626,42.266 79.704,42.318 79.9,42.357 80.4,42.357 80.596,42.318 80.762,42.207 80.874,42.04 80.913,41.844 80.913,41.344 80.874,41.148 80.762,40.981 80.596,40.87 80.4,40.831 79.9,40.831 79.704,40.87 79.626,40.922 79.536,40.922 79.491,40.878 79.447,40.833 79.447,37.225 79.408,37.029 79.361,36.917 79.287,36.805 79.25,36.75 78.154,35.654 78.121,35.632 77.987,35.543 77.875,35.496 77.679,35.457 75.549,35.457 75.471,35.405 75.275,35.366 74.775,35.366 74.579,35.405 74.412,35.516 74.301,35.683 74.262,35.879 74.262,36.379 74.301,36.575 74.412,36.741 74.579,36.853 74.775,36.892 75.275,36.892 75.471,36.853 75.549,36.8 77.401,36.8 78.103,37.503 78.103,40.833 78.059,40.878 78.014,40.922 77.388,40.922 77.388,40.594 77.349,40.398 77.238,40.231 77.071,40.12 76.875,40.081 75.875,40.081 75.679,40.12 75.512,40.231 75.401,40.398 75.362,40.594 75.362,42.594 75.401,42.79 75.512,42.957 75.679,43.068 75.875,43.107 76.875,43.107
  pour cut-out: 80.596,41.418 80.762,41.307 80.874,41.14 80.913,40.944 80.913,40.444 80.874,40.248 80.821,40.17 80.821,40.036 80.866,39.991 80.911,39.947 81.726,39.947 81.804,39.999 82,40.038 82.5,40.038 82.696,39.999 82.774,39.947 83.876,39.947 83.954,39.999 84.15,40.038 84.65,40.038 84.846,39.999 85.012,39.888 85.124,39.721 85.163,39.525 85.163,39.025 85.124,38.829 85.012,38.662 84.846,38.551 84.65,38.512 84.15,38.512 83.954,38.551 83.876,38.603 82.774,38.603 82.696,38.551 82.5,38.512 82,38.512 81.804,38.551 81.726,38.603 80.911,38.603 80.866,38.559 80.822,38.514 80.822,36.575 80.783,36.379 80.736,36.267 80.662,36.155 80.625,36.1 78.88,34.355 78.847,34.333 78.714,34.244 78.681,34.231 78.601,34.198 78.405,34.159 78.324,34.159 78.246,34.106 78.05,34.067 77.55,34.067 77.354,34.106 77.187,34.217 77.076,34.384 77.037,34.58 77.037,35.08 77.076,35.276 77.187,35.443 77.354,35.554 77.55,35.593 78.05,35.593 78.19,35.565 79.478,36.853 79.478,38.514 79.434,38.559 79.363,38.63 79.253,38.795 79.176,38.98 79.137,39.175 79.137,39.225 79.127,39.275 79.137,39.325 79.137,39.375 79.176,39.57 79.253,39.755 79.363,39.92 79.434,39.991 79.478,40.036 79.478,40.17 79.426,40.248 79.387,40.444 79.387,40.944 79.426,41.14 79.537,41.307 79.704,41.418 79.9,41.457 80.4,41.457
  pour cut-out: 66.467,40.224 66.633,40.113 66.745,39.946 66.784,39.75 66.784,39.25 66.745,39.054 66.692,38.976 66.692,38.897 67.458,38.897 67.591,38.986 67.592,38.986 67.704,39.033 67.9,39.072 68.989,39.072 69.034,39.116 69.105,39.187 69.27,39.297 69.455,39.374 69.65,39.413 69.85,39.413 70.045,39.374 70.23,39.297 70.395,39.187 70.466,39.116 70.513,39.069 71.203,39.067 71.279,39.118 71.475,39.157 71.975,39.157 72.171,39.118 72.337,39.007 72.449,38.84 72.488,38.644 72.488,38.144 72.449,37.948 72.337,37.781 72.171,37.67 71.975,37.631 71.475,37.631 71.279,37.67 71.198,37.724 70.508,37.726 70.466,37.684 70.395,37.613 70.23,37.503 70.045,37.426 69.85,37.387 69.65,37.387 69.455,37.426 69.27,37.503 69.105,37.613 69.034,37.684 68.989,37.728 68.167,37.728 68.034,37.639 68.033,37.639 67.921,37.592 67.725,37.553 66.545,37.553 66.467,37.501 66.271,37.462 65.771,37.462 65.575,37.501 65.497,37.553 65.27,37.553 65.192,37.501 64.996,37.462 64.496,37.462 64.3,37.501 64.133,37.612 64.022,37.779 63.983,37.975 63.983,38.475 64.022,38.671 64.133,38.838 64.3,38.949 64.496,38.988 64.996,38.988 65.192,38.949 65.27,38.897 65.349,38.897 65.349,38.976 65.297,39.054 65.258,39.25 65.258,39.75 65.297,39.946 65.408,40.113 65.575,40.224 65.771,40.263 66.271,40.263
  pour cut-out: 70.045,42.574 70.23,42.497 70.395,42.387 70.466,42.316 70.513,42.269 71.203,42.267 71.279,42.318 71.475,42.357 71.975,42.357 72.171,42.318 72.337,42.207 72.449,42.04 72.488,41.844 72.488,41.344 72.449,41.148 72.337,40.981 72.171,40.87 71.975,40.831 71.475,40.831 71.279,40.87 71.198,40.924 70.508,40.926 70.466,40.884 70.395,40.813 70.23,40.703 70.045,40.626 69.85,40.587 69.65,40.587 69.455,40.626 69.27,40.703 69.105,40.813 69.034,40.884 68.977,40.941 67.9,40.941 67.809,40.959 67.704,40.98 67.619,41.015 67.592,41.027 67.591,41.027 67.48,41.101 67.477,41.103 66.692,41.103 66.692,41.024 66.745,40.946 66.784,40.75 66.784,40.25 66.745,40.054 66.633,39.887 66.467,39.776 66.271,39.737 65.771,39.737 65.575,39.776 65.408,39.887 65.297,40.054 65.258,40.25 65.258,40.75 65.297,40.946 65.349,41.024 65.349,41.103 65.295,41.103 65.217,41.051 65.021,41.012 64.521,41.012 64.325,41.051 64.158,41.162 64.047,41.329 64.008,41.525 64.008,42.025 64.047,42.221 64.158,42.388 64.325,42.499 64.521,42.538 65.021,42.538 65.217,42.499 65.295,42.447 65.497,42.447 65.575,42.499 65.771,42.538 66.271,42.538 66.467,42.499 66.545,42.447 67.738,42.447 67.934,42.408 68.046,42.361 68.157,42.287 68.161,42.284 69.002,42.284 69.034,42.316 69.105,42.387 69.27,42.497 69.455,42.574 69.65,42.613 69.85,42.613
Bottom Layer:
  pour cut-out: 38.426,11.426 cw(c38.426,11.526) 38.426,11.627 39.326,11.627 cw(c39.326,11.526) 39.326,11.426
  pour cut-out: 36.658,11.426 cw(c36.658,11.526) 36.658,11.627 37.558,11.627 cw(c37.558,11.526) 37.558,11.426
  pour cut-out: 38.426,8.574 ccw(c38.426,8.474) 38.426,8.373 39.326,8.373 ccw(c39.326,8.474) 39.326,8.574
  pour cut-out: 36.658,8.574 ccw(c36.658,8.474) 36.658,8.373 37.558,8.373 ccw(c37.558,8.474) 37.558,8.574
  pour cut-out: 38.426,51.426 cw(c38.426,51.526) 38.426,51.627 39.326,51.627 cw(c39.326,51.526) 39.326,51.426
  pour cut-out: 36.658,51.426 cw(c36.658,51.526) 36.658,51.627 37.558,51.627 cw(c37.558,51.526) 37.558,51.426
  pour cut-out: 38.426,48.574 ccw(c38.426,48.474) 38.426,48.373 39.326,48.373 ccw(c39.326,48.474) 39.326,48.574
  pour cut-out: 36.658,48.574 ccw(c36.658,48.474) 36.658,48.373 37.558,48.373 ccw(c37.558,48.474) 37.558,48.574
  pour cut-out: 112.926,51.426 cw(c112.926,51.526) 112.926,51.627 113.826,51.627 cw(c113.826,51.526) 113.826,51.426
  pour cut-out: 111.158,51.426 cw(c111.158,51.526) 111.158,51.627 112.058,51.627 cw(c112.058,51.526) 112.058,51.426
  pour cut-out: 112.926,48.574 ccw(c112.926,48.474) 112.926,48.373 113.826,48.373 ccw(c113.826,48.474) 113.826,48.574
  pour cut-out: 111.158,48.574 ccw(c111.158,48.474) 111.158,48.373 112.058,48.373 ccw(c112.058,48.474) 112.058,48.574
  pour cut-out: 111.158,8.574 ccw(c111.158,8.474) 111.158,8.373 112.058,8.373 ccw(c112.058,8.474) 112.058,8.574